# Altium PCB UF_Servo.PcbDoc (part 1 of 12)
Units mm, origin at the board's own origin, x right, y up, seen from the top; angles counter-clockwise.
Board outline 222.63 x 100.1 mm, 6 copper layers (L1, L2, L3, L4, L5, L6), stack 1.609 mm thick; 1138 components, 775 nets, 3720 pads, 1641 vias.
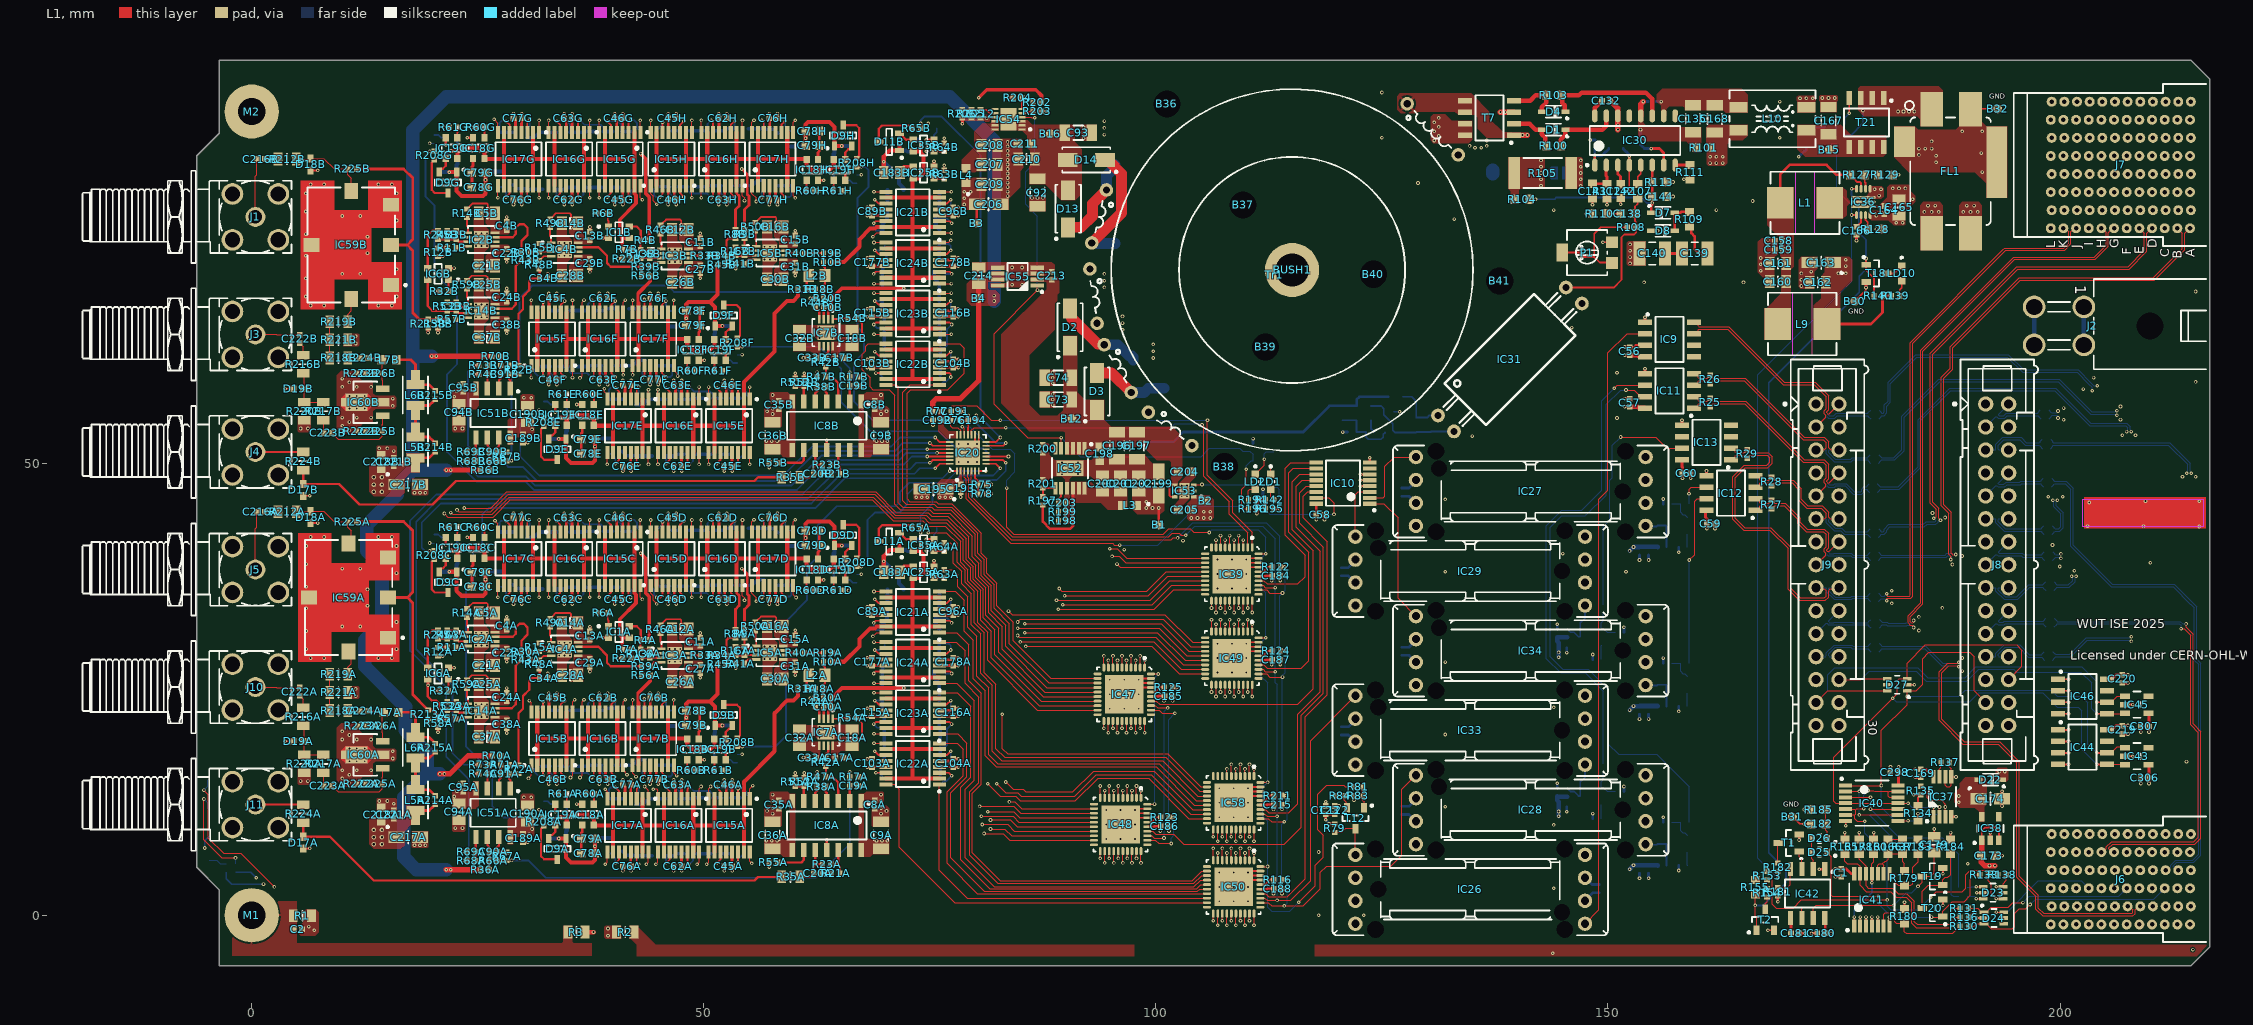
[diagram p0: L1 view]
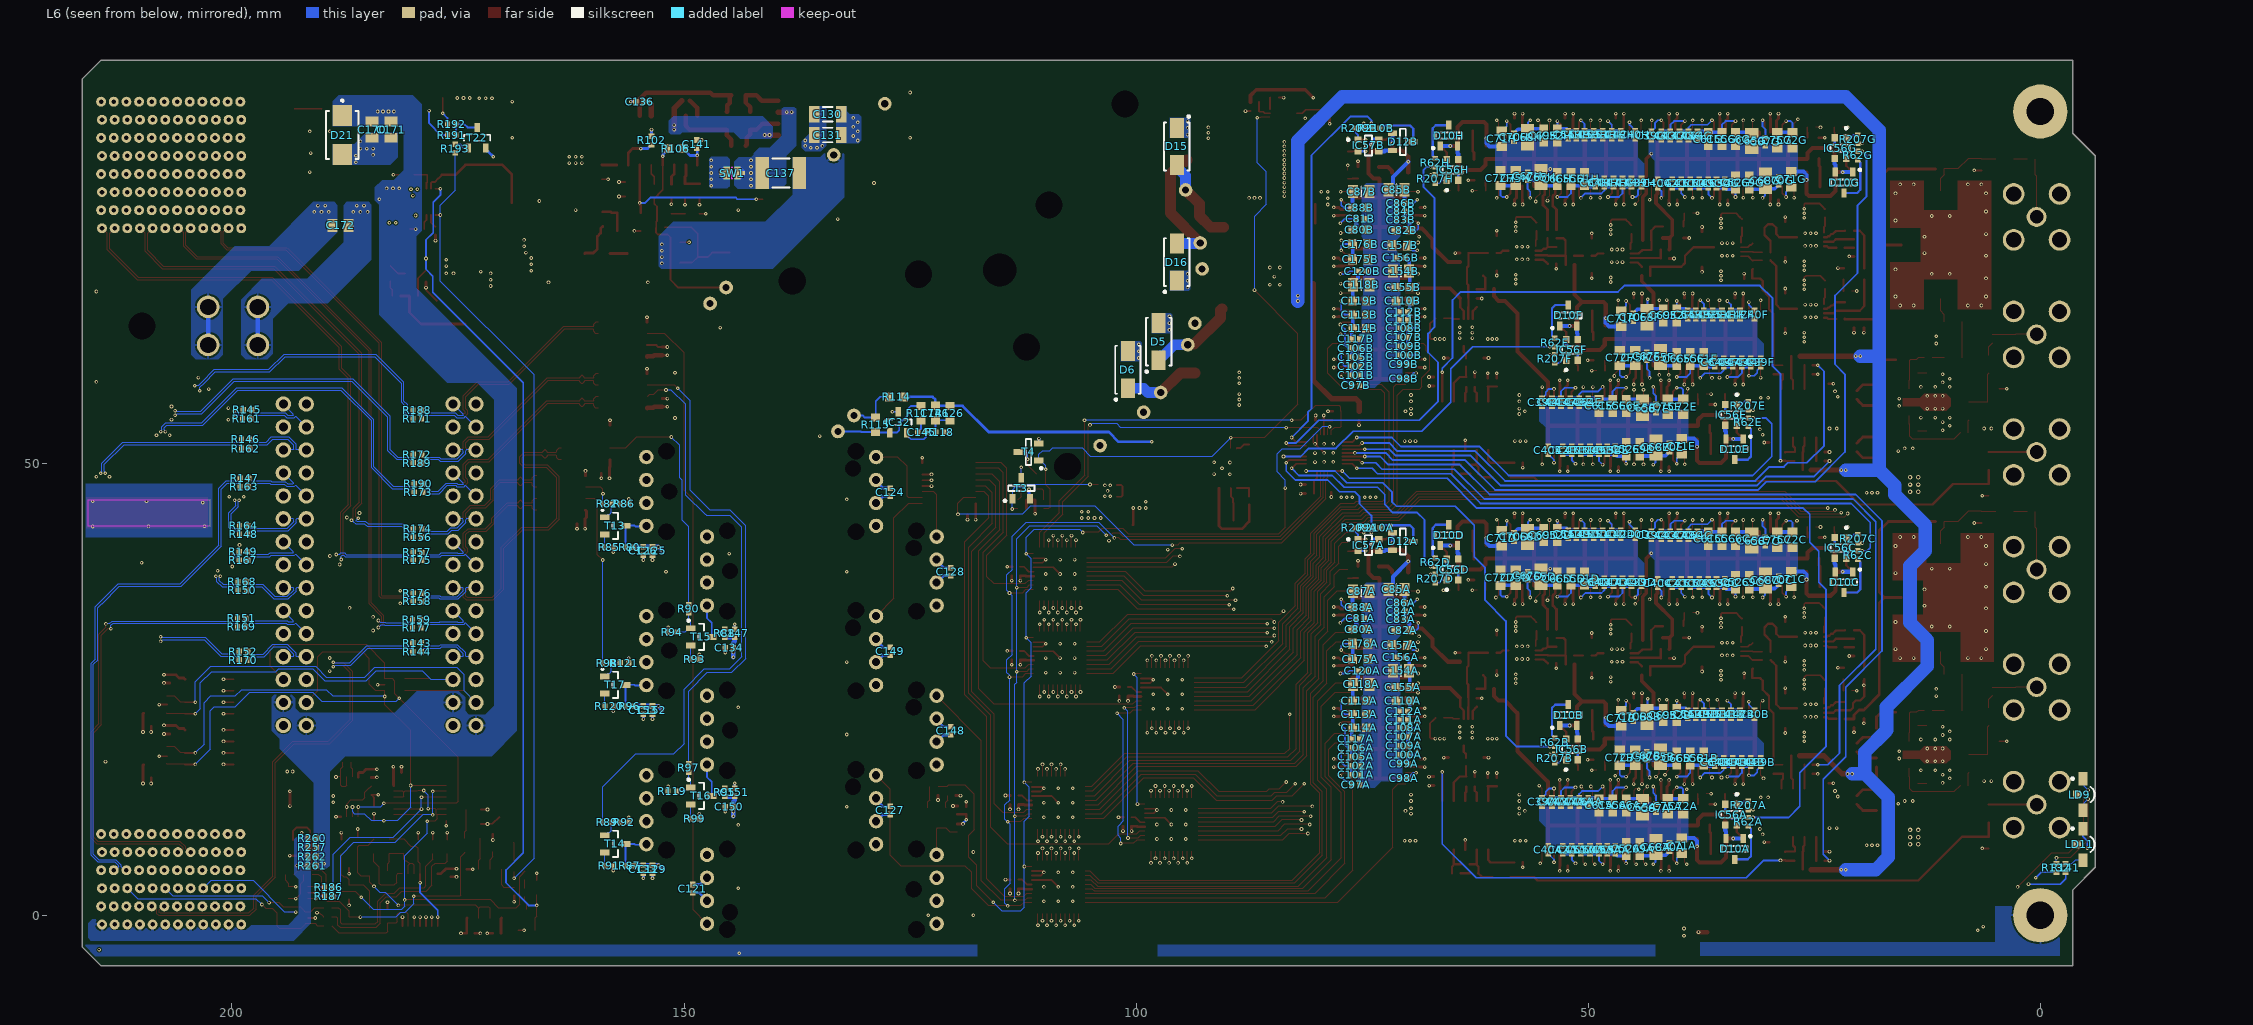
[diagram p1: L6 view, seen from below]
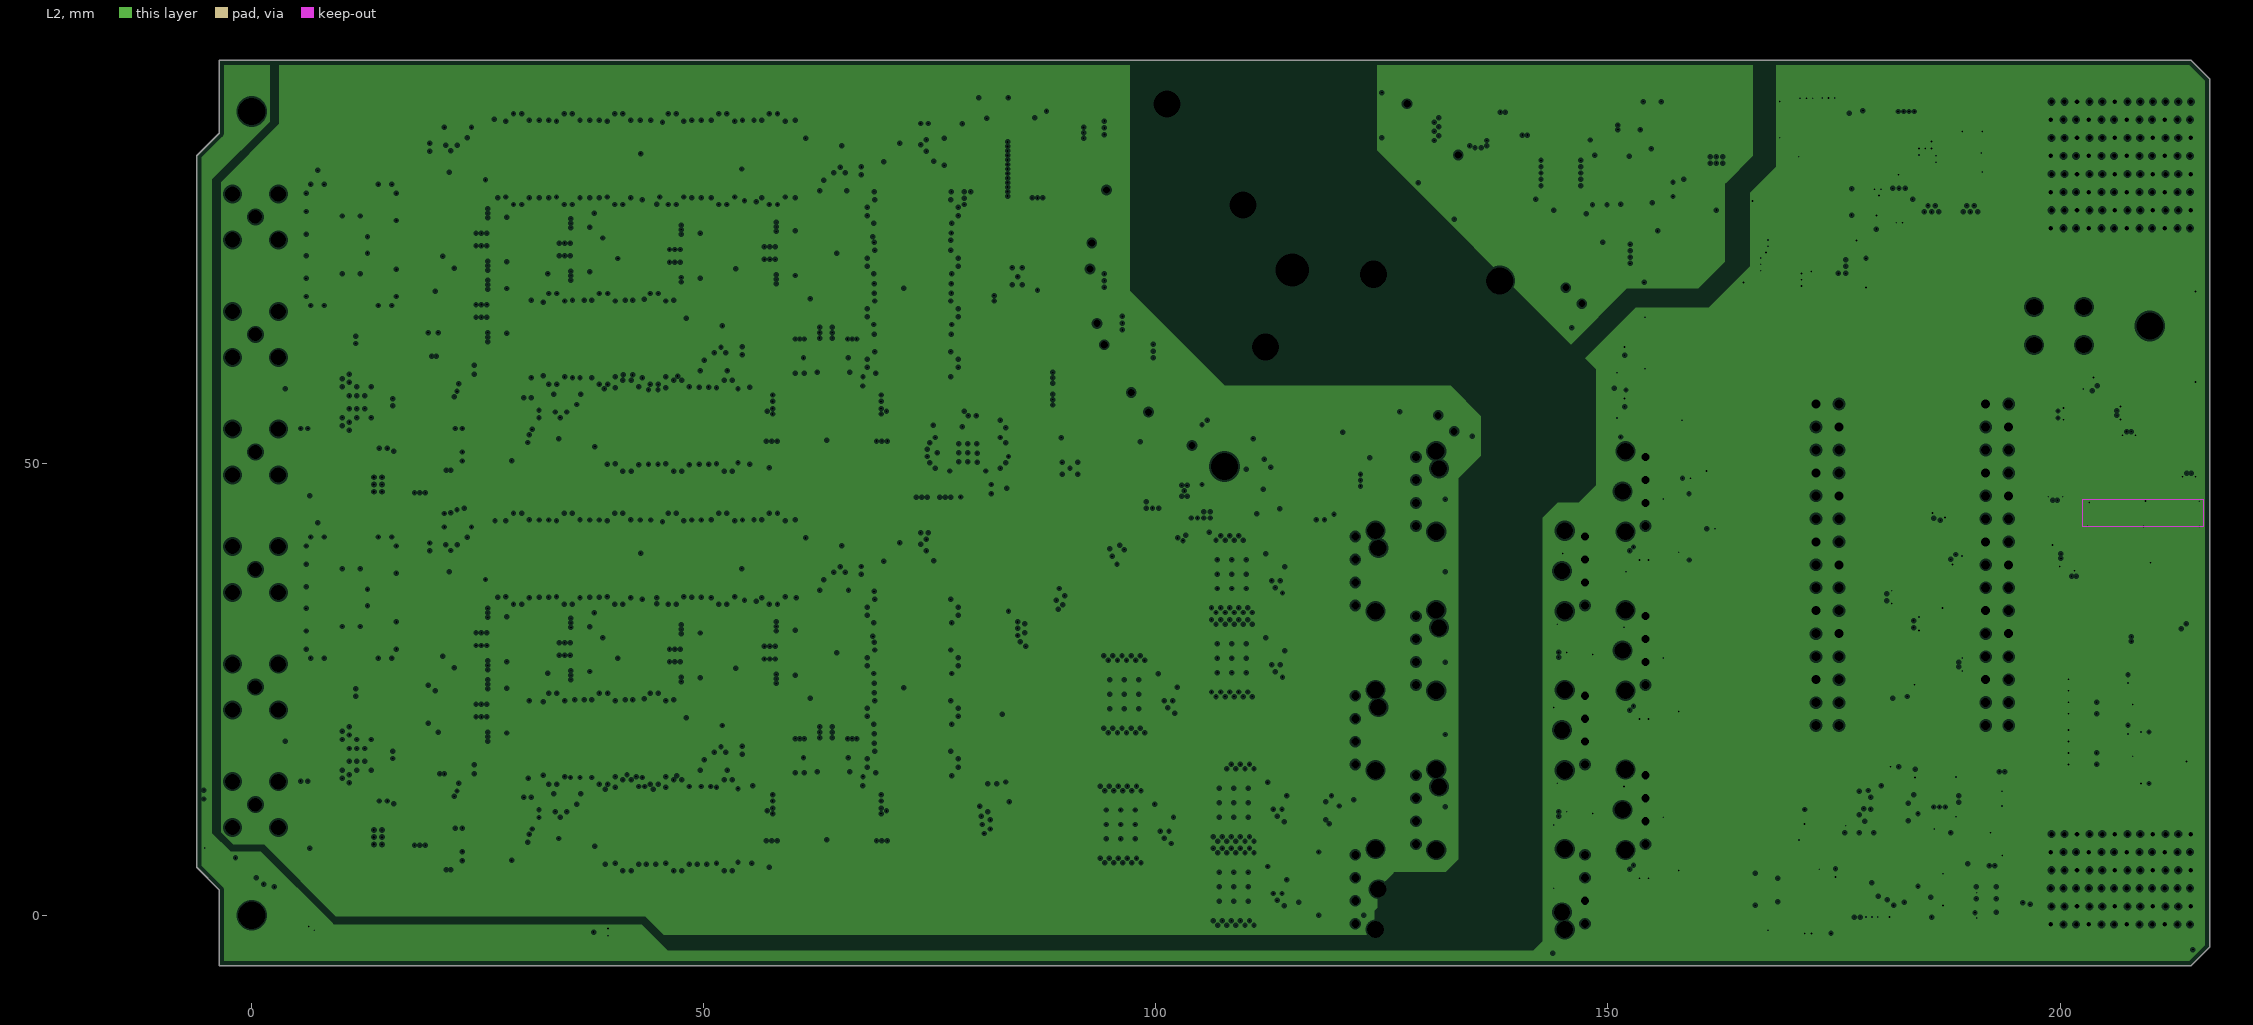
[diagram p2: L2, clearances drawn from the general rule]
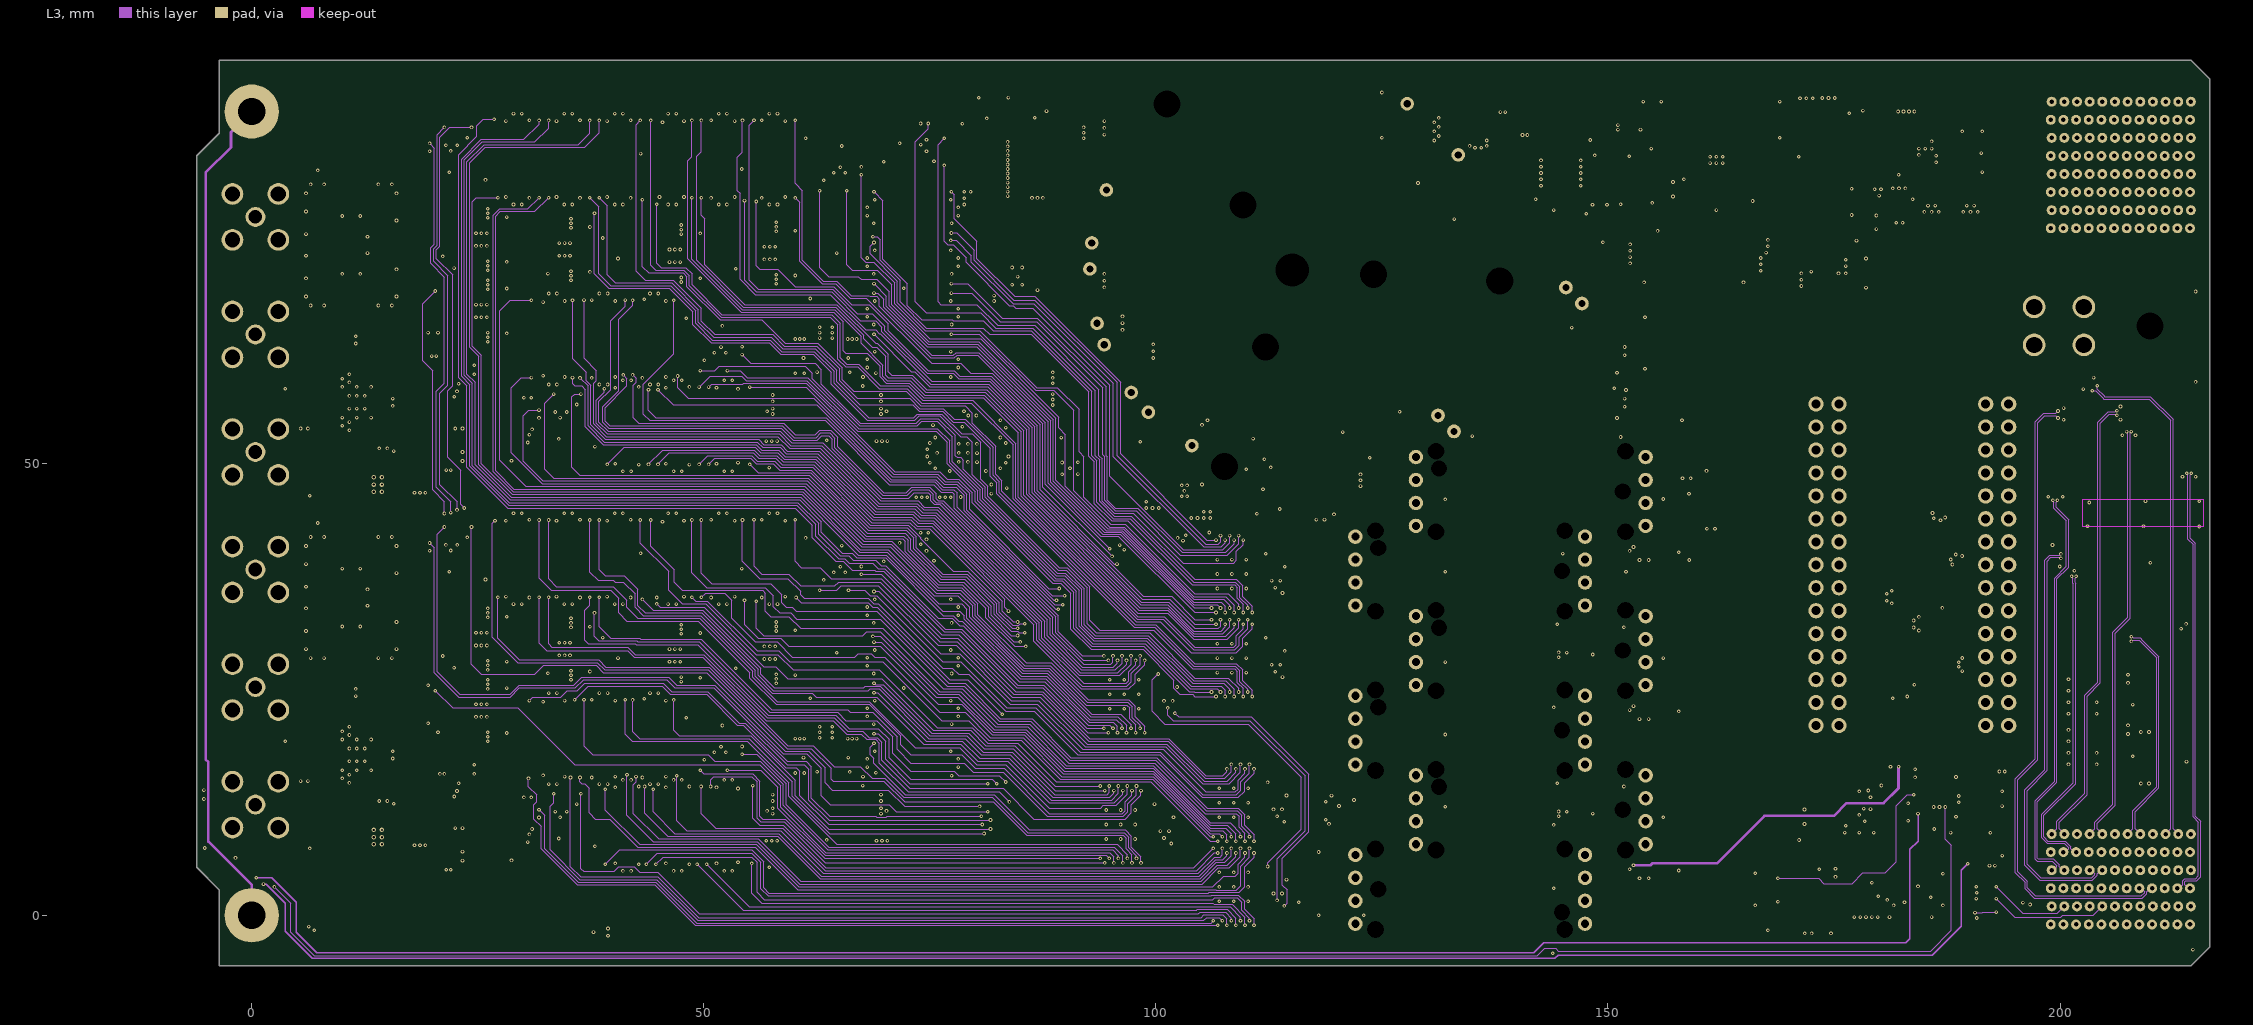
[diagram p3: L3]
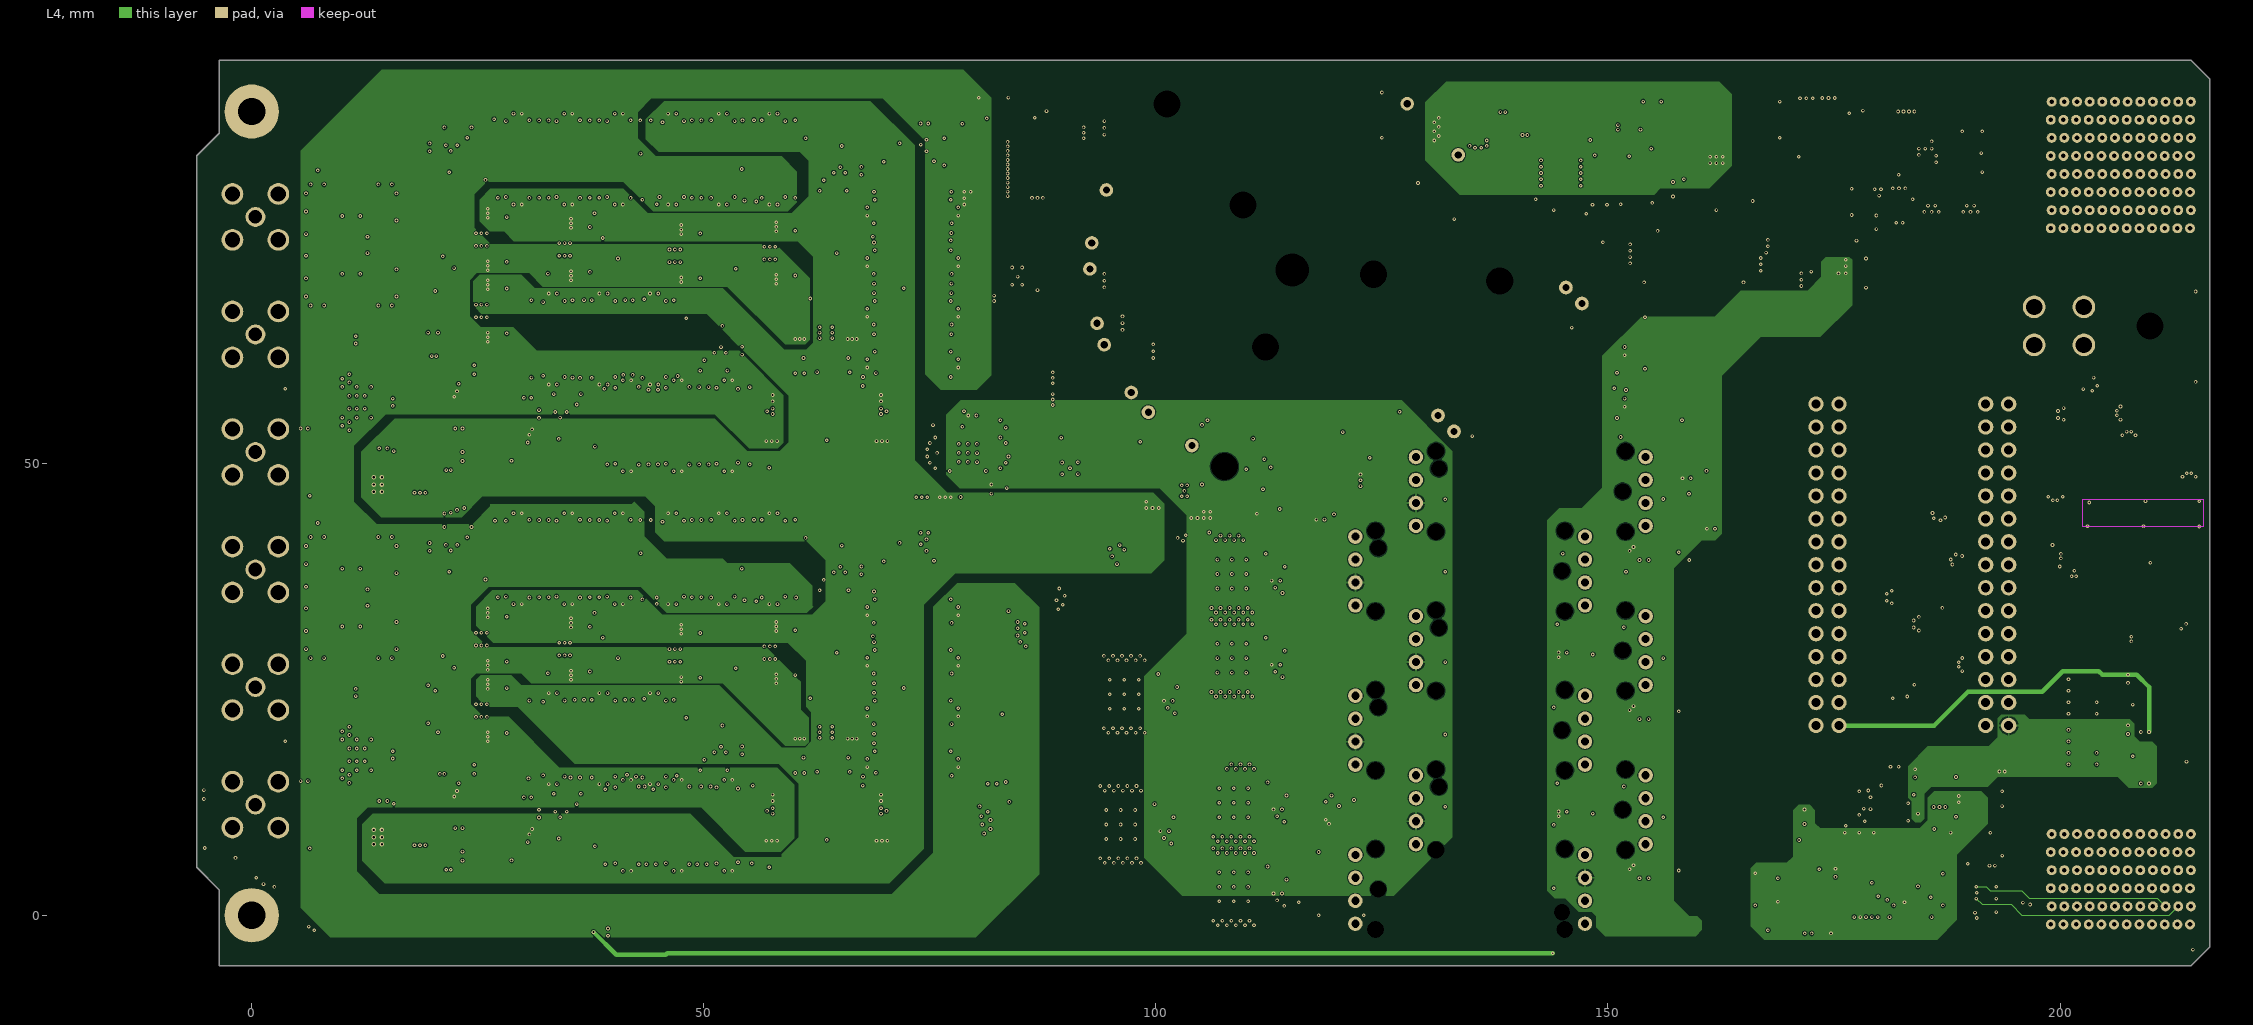
[diagram p4: L4]
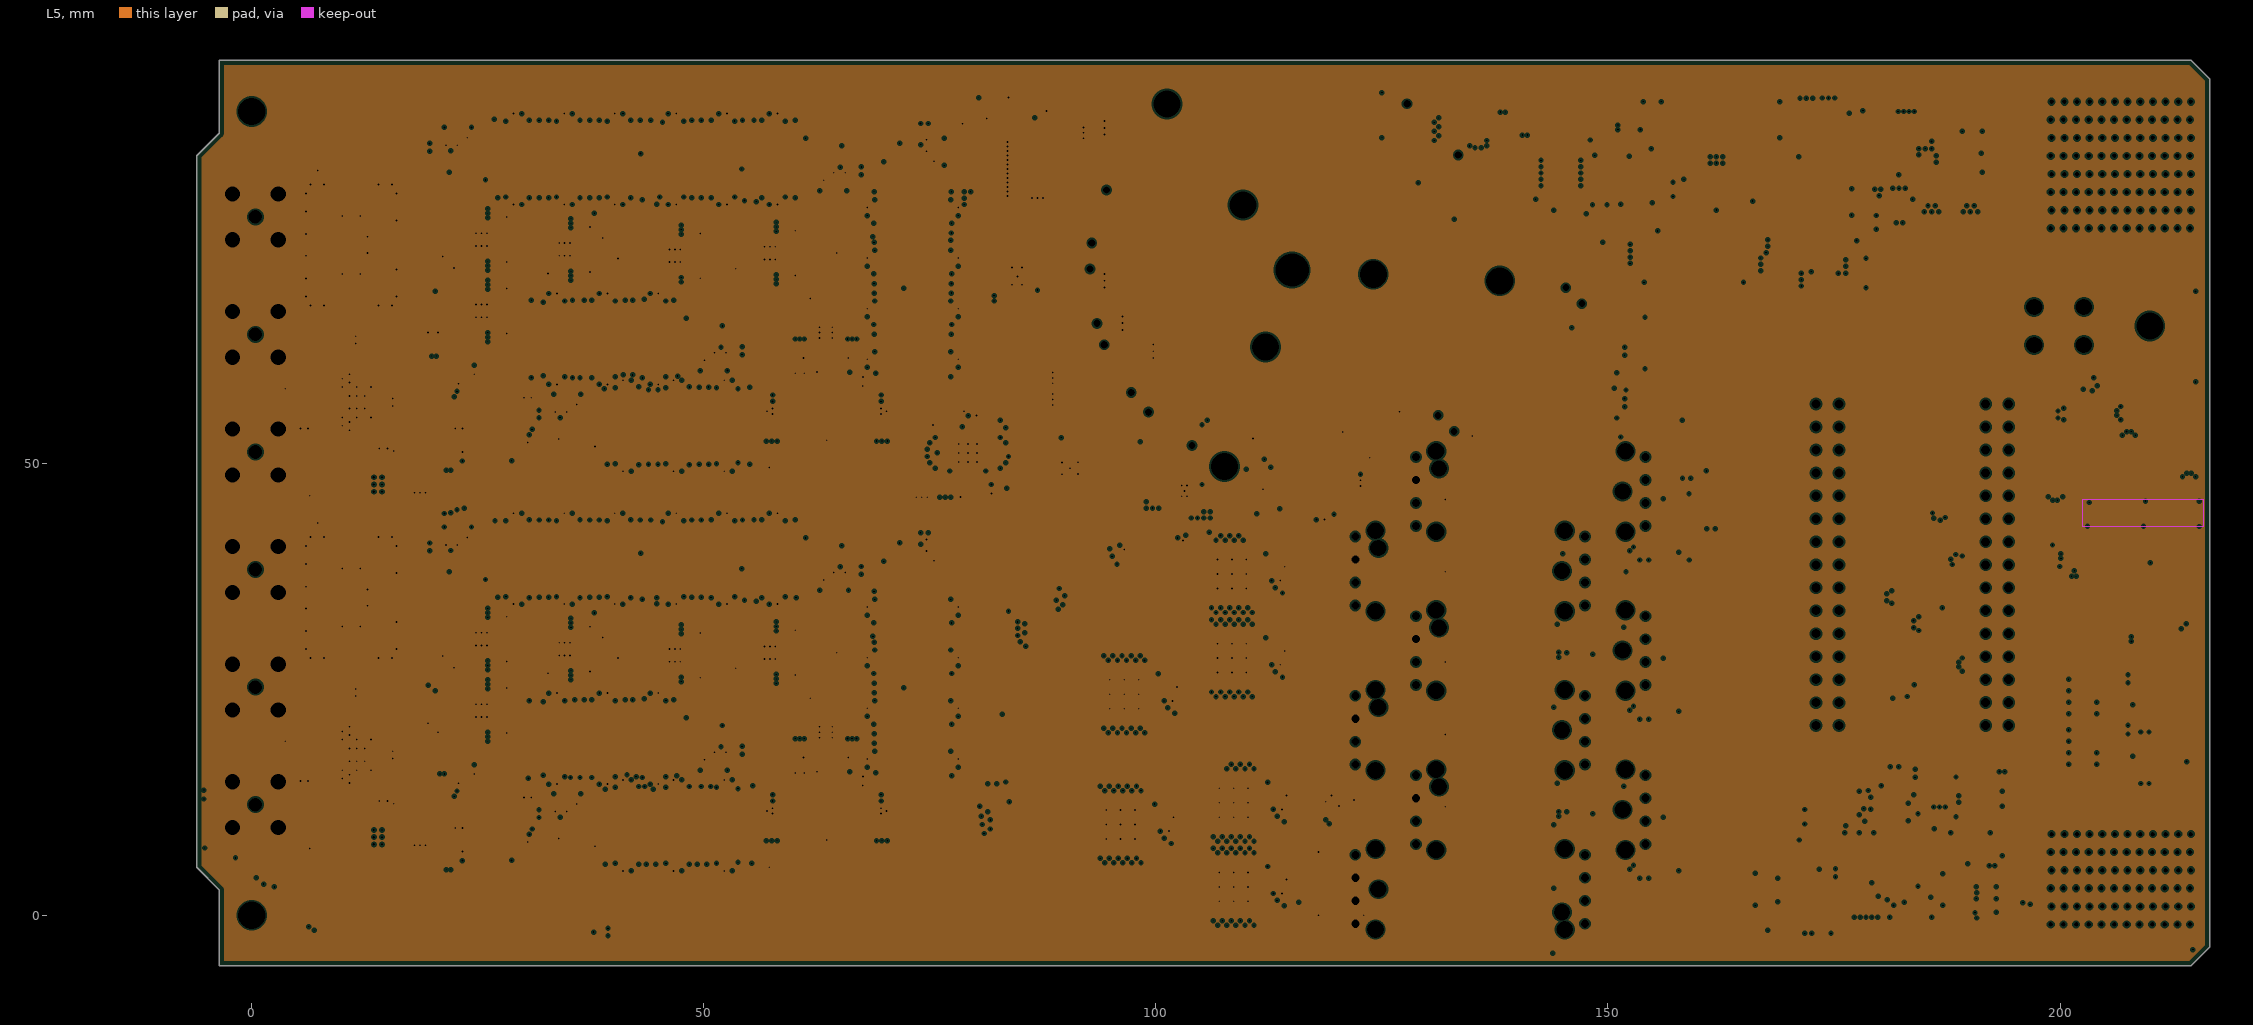
[diagram p5: L5, clearances drawn from the general rule]
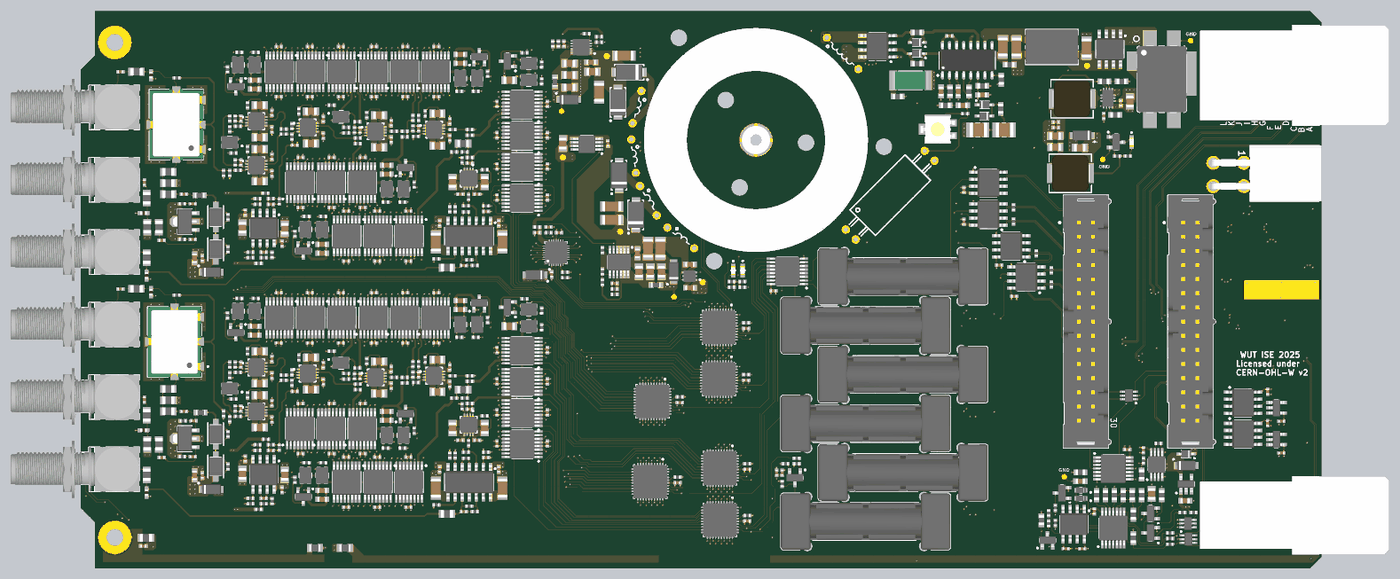
[diagram p14: 3D render of the assembled board from above, using the file's embedded part models]
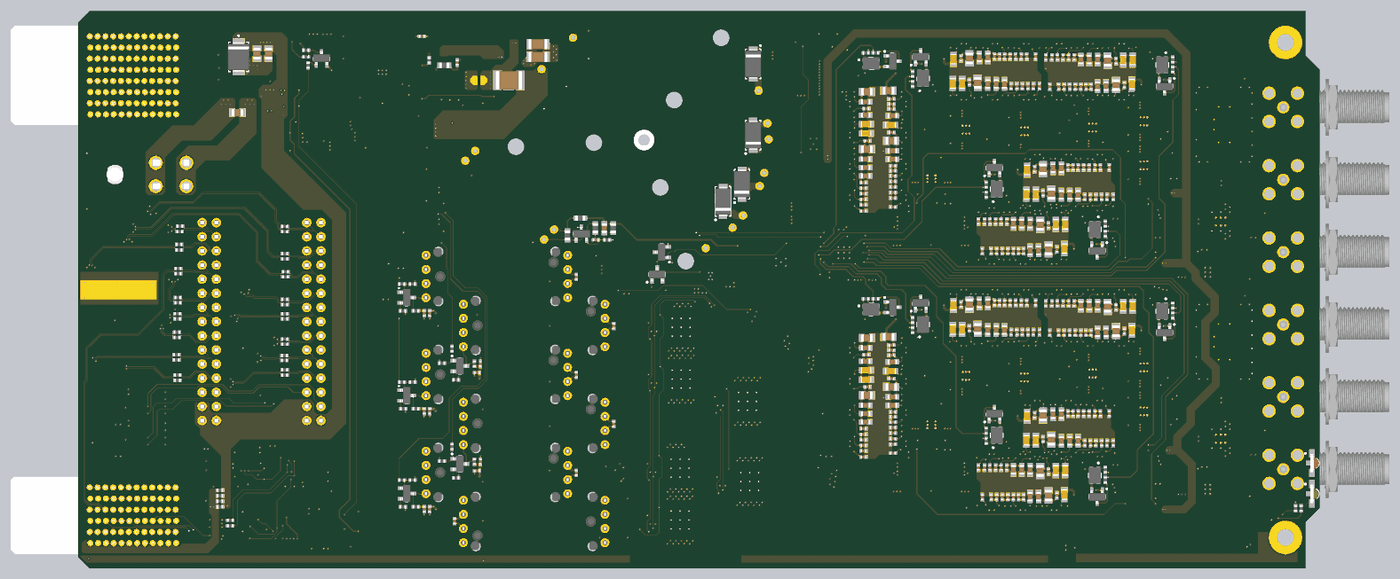
[diagram p15: 3D render of the assembled board from below, using the file's embedded part models]

## Layer stack, top to bottom
Top Solder: solder mask 0.0102, Solder Resist, Dk 3.5
L1: signal copper 0.035
Dielectric 1: prepreg 0.0764, 1080, Dk 3.91
L2: plane copper 0.0152, net (Multiple Nets)
Dielectric 2: core 0.1, Core, Dk 4.36
L3: signal copper 0.0175
Dielectric 3: prepreg 0.2104, 7628, Dk 4.4
Dielectric 4: core 0.7, FR4, Dk 4.53
Dielectric 5: prepreg 0.2104, 7628, Dk 4.4
L4: signal copper 0.0175
Dielectric 6: core 0.1, Core, Dk 4.36
L5: plane copper 0.0152, net GND
Dielectric 7: prepreg 0.0764, 1080, Dk 3.91
L6: signal copper 0.035
Bottom Solder: solder mask 0.0102, Solder Resist, Dk 3.5

## Board outline
-3.606,2.849 -6.096,5.371 -6.096,17.196 -6.096,84.061 -3.606,86.55 -3.606,94.601 214.504,94.601 216.533,92.571 216.533,-3.471 214.504,-5.5 -3.606,-5.5

## Design rules (kind name [scope] priority, off if disabled: settings)
Clearance [All] p1: gap=0.1 ignorepadtopadclearanceinfootprint=FALSE
DiffPairsRouting DiffPairsRouting_D100 [InNetClass('D100')] p1: maxlimit=0.16 minlimit=0.15 mostfreqgap=0.16 toplayer_maxgap=0.15 toplayer_prefgap=0.15 toplayer_minwidth=0.108 toplayer_maxwidth=0.108 toplayer_prefwidth=0.108 midlayer1_mingap=0.16 midlayer1_minwidth=0.102 midlayer1_maxwidth=0.102 midlayer1_prefwidth=0.102 midlayer2_mingap=0.16 midlayer2_minwidth=0.102 midlayer2_maxwidth=0.102 midlayer2_prefwidth=0.102 bottomlayer_maxgap=0.15 bottomlayer_prefgap=0.15 bottomlayer_minwidth=0.108 bottomlayer_maxwidth=0.108 bottomlayer_prefwidth=0.108 impedanceprofiledriven=TRUE impedanceprofileid={D2DCF238-4DA4-4039-ADAF-720FADDC23DE} impedanceprofilevalue=100.000000 maxuncoupledlength=12.7
PlaneClearance [All] p1: clearance=0.2
PlaneConnect [All] p1: pad.planeconnectstyle=Relief pad.reliefexpansion=0.508 pad.reliefentries=4 pad.reliefconductorwidth=0.254 pad.reliefairgap=0.2 via.planeconnectstyle=Direct via.reliefexpansion=0.508 via.reliefentries=4 via.reliefconductorwidth=0.254 via.reliefairgap=0.254
PolygonConnect [All] p1: thpad.connectstyle=Relief thpad.reliefconductorwidth=0.254 thpad.reliefentries=4 thpad.polygonreliefangle="90 Angle" thpad.airgapwidth=0.2 smdpad.connectstyle=Direct smdpad.reliefconductorwidth=0.254 smdpad.reliefentries=4 smdpad.polygonreliefangle="90 Angle" smdpad.airgapwidth=0.254 via.connectstyle=Direct via.reliefconductorwidth=0.254 via.reliefentries=4 via.polygonreliefangle="90 Angle" via.airgapwidth=0.254
RoutingVias [All] p1: holewidth=0.2 width=0.4 viastyle="Through Hole" minholewidth=0.2 minwidth=0.4 maxholewidth=0.711 maxwidth=1.27
SolderMaskExpansion [All] p1: expansion=0.05 istentingtop=FALSE
SupplyNets "Schematic Supply Nets_18" [InNet('P2V5_REF')] p1: voltage=0.000
SupplyNets "Schematic Supply Nets_16" [InNet('GND_DIOT')] p2: voltage=0.000
SupplyNets "Schematic Supply Nets_15" [InNet('P6V0')] p3: voltage=0.000
SupplyNets "Schematic Supply Nets_14" [InNet('P12V0_EEM')] p4: voltage=0.000
SupplyNets "Schematic Supply Nets_13" [InNet('P3V3_MP')] p5: voltage=0.000
SupplyNets "Schematic Supply Nets_12" [InNet('STRIP1')] p6: voltage=0.000
SupplyNets "Schematic Supply Nets_11" [InNet('GND_LLC')] p7: voltage=0.000
SupplyNets "Schematic Supply Nets_10" [InNet('P3V3_MP2')] p8: voltage=0.000
SupplyNets "Schematic Supply Nets_9" [InNet('N6V0')] p9: voltage=0.000
SupplyNets "Schematic Supply Nets_8" [InNet('P3V3_ISO')] p10: voltage=0.000
SupplyNets "Schematic Supply Nets_7" [InNet('P3V3_DIOT')] p11: voltage=0.000
SupplyNets "Schematic Supply Nets_6" [InNet('P12V0_LLC')] p12: voltage=0.000
SupplyNets "Schematic Supply Nets_4" [InNet('P12V0_DIOT')] p13: voltage=0.000
SupplyNets "Schematic Supply Nets_3" [InNet('P3V3')] p14: voltage=0.000
SupplyNets "Schematic Supply Nets_2" [InNet('P5V0')] p15: voltage=0.000
SupplyNets "Schematic Supply Nets_1" [InNet('N5V0')] p16: voltage=0.000
SupplyNets "Schematic Supply Nets" [InNet('GND')] p17: voltage=0.000
Width Width_S50 [InNetClass('S50')] p1: maxlimit=10 minlimit=0.1 preferedwidth=0.132 toplayer_minwidth=0.132 toplayer_maxwidth=0.132 bottomlayer_minwidth=0.132 bottomlayer_maxwidth=0.132 impedanceprofiledriven=TRUE impedanceprofileid={ACBF6A8C-5145-4914-8C15-B171286C9024} impedanceprofilevalue=50.000000 minimp=50.000000 maximp=50.000000 favimp=50.000000
Width [All] p2: maxlimit=10 minlimit=0.1 preferedwidth=0.1
27 further rules are at their usual default settings.

## Classes and differential pairs
net class CH_B_ctrl: CAP0.CAP_SEL0.SEL0 CAP0.CAP_SEL0.SEL1 CAP0.CAP_SEL0.SEL2 CAP0.CAP_SEL0.SEL3 CAP0.CAP_SEL1.SEL0 CAP0.CAP_SEL1.SEL1 CAP0.CAP_SEL1.SEL2 CAP0.CAP_SEL1.SEL3 CAP0.CAP_SEL2.SEL0 CAP0.CAP_SEL2.SEL1 CAP0.CAP_SEL2.SEL2 CAP0.CAP_SEL2.SEL3 CAP1.CAP_SEL0.SEL0 CAP1.CAP_SEL0.SEL1 CAP1.CAP_SEL0.SEL2 CAP1.CAP_SEL0.SEL3 CAP1.CAP_SEL1.SEL0 CAP1.CAP_SEL1.SEL1 CAP1.CAP_SEL1.SEL2 CAP1.CAP_SEL1.SEL3 CAP1.CAP_SEL2.SEL0 CAP1.CAP_SEL2.SEL1 CAP1.CAP_SEL2.SEL2 CAP1.CAP_SEL2.SEL3 CAP2.CAP_SEL0.SEL0 CAP2.CAP_SEL0.SEL1 CAP2.CAP_SEL0.SEL2 CAP2.CAP_SEL0.SEL3 CAP2.CAP_SEL1.SEL0 CAP2.CAP_SEL1.SEL1 CAP2.CAP_SEL1.SEL2 CAP2.CAP_SEL1.SEL3 CAP2.CAP_SEL2.SEL0 CAP2.CAP_SEL2.SEL1 CAP2.CAP_SEL2.SEL2 CAP2.CAP_SEL2.SEL3 CAP2.CAP_SEL3.SEL0 CAP2.CAP_SEL3.SEL1 CAP2.CAP_SEL3.SEL2 CAP2.CAP_SEL3.SEL3 CAP3.CAP_SEL0.SEL0 CAP3.CAP_SEL0.SEL1 CAP3.CAP_SEL0.SEL2 CAP3.CAP_SEL0.SEL3 CAP3.CAP_SEL1.SEL0 CAP3.CAP_SEL1.SEL1 CAP3.CAP_SEL1.SEL2 CAP3.CAP_SEL1.SEL3 CAP3.CAP_SEL2.SEL0 CAP3.CAP_SEL2.SEL1 CAP3.CAP_SEL2.SEL2 CAP3.CAP_SEL2.SEL3 CAP4.CAP_SEL0.SEL0 CAP4.CAP_SEL0.SEL1 CAP4.CAP_SEL0.SEL2 CAP4.CAP_SEL0.SEL3 CAP4.CAP_SEL1.SEL0 CAP4.CAP_SEL1.SEL1 CAP4.CAP_SEL1.SEL2 CAP4.CAP_SEL1.SEL3 CAP4.CAP_SEL2.SEL0 CAP4.CAP_SEL2.SEL1 CAP4.CAP_SEL2.SEL2 CAP4.CAP_SEL2.SEL3 DAC_LDACn DAC_RESETn EXP0_P16 EXP0_P17 EXP0_P18 EXP0_P31 EXP1_P4 EXP1_P5 EXP1_P21 EXP1_P22 EXP1_P23 EXP2_P9 EXP2_P10 EXP2_P11 EXP2_P24 EXP2_P25 EXP2_P26 EXP2_P27 EXP2_P28 NetIC39_3 NetIC39_4 NetIC39_6 NetIC39_10 NetIC39_12 NetIC39_13 NetIC39_14 NetIC47_25 NetIC47_26 NetIC47_27 NetIC49_1 NetIC49_3 NetIC49_24 NetIC49_26
net class CH_A_ctrl: CAP5.CAP_SEL0.SEL0 CAP5.CAP_SEL0.SEL1 CAP5.CAP_SEL0.SEL2 CAP5.CAP_SEL0.SEL3 CAP5.CAP_SEL1.SEL0 CAP5.CAP_SEL1.SEL1 CAP5.CAP_SEL1.SEL2 CAP5.CAP_SEL1.SEL3 CAP5.CAP_SEL2.SEL0 CAP5.CAP_SEL2.SEL1 CAP5.CAP_SEL2.SEL2 CAP5.CAP_SEL2.SEL3 CAP6.CAP_SEL0.SEL0 CAP6.CAP_SEL0.SEL1 CAP6.CAP_SEL0.SEL2 CAP6.CAP_SEL0.SEL3 CAP6.CAP_SEL1.SEL0 CAP6.CAP_SEL1.SEL1 CAP6.CAP_SEL1.SEL2 CAP6.CAP_SEL1.SEL3 CAP6.CAP_SEL2.SEL0 CAP6.CAP_SEL2.SEL1 CAP6.CAP_SEL2.SEL2 CAP6.CAP_SEL2.SEL3 CAP7.CAP_SEL0.SEL0 CAP7.CAP_SEL0.SEL1 CAP7.CAP_SEL0.SEL2 CAP7.CAP_SEL0.SEL3 CAP7.CAP_SEL1.SEL0 CAP7.CAP_SEL1.SEL1 CAP7.CAP_SEL1.SEL2 CAP7.CAP_SEL1.SEL3 CAP7.CAP_SEL2.SEL0 CAP7.CAP_SEL2.SEL1 CAP7.CAP_SEL2.SEL2 CAP7.CAP_SEL2.SEL3 CAP7.CAP_SEL3.SEL0 CAP7.CAP_SEL3.SEL1 CAP7.CAP_SEL3.SEL2 CAP7.CAP_SEL3.SEL3 CAP8.CAP_SEL0.SEL0 CAP8.CAP_SEL0.SEL1 CAP8.CAP_SEL0.SEL2 CAP8.CAP_SEL0.SEL3 CAP8.CAP_SEL1.SEL0 CAP8.CAP_SEL1.SEL1 CAP8.CAP_SEL1.SEL2 CAP8.CAP_SEL1.SEL3 CAP8.CAP_SEL2.SEL0 CAP8.CAP_SEL2.SEL1 CAP8.CAP_SEL2.SEL2 CAP8.CAP_SEL2.SEL3 CAP9.CAP_SEL0.SEL0 CAP9.CAP_SEL0.SEL1 CAP9.CAP_SEL0.SEL2 CAP9.CAP_SEL0.SEL3 CAP9.CAP_SEL1.SEL0 CAP9.CAP_SEL1.SEL1 CAP9.CAP_SEL1.SEL2 CAP9.CAP_SEL1.SEL3 CAP9.CAP_SEL2.SEL0 CAP9.CAP_SEL2.SEL1 CAP9.CAP_SEL2.SEL2 CAP9.CAP_SEL2.SEL3 EXP2_P29 EXP2_P30 EXP3_P16 EXP3_P17 EXP3_P18 EXP3_P31 EXP4_P4 EXP4_P5 EXP4_P22 EXP4_P23 EXP4_P24 EXP5_24 EXP5_25 EXP5_26 EXP5_P9 EXP5_P10 EXP5_P11 NetIC58_8 NetIC58_9 NetIC58_10
net class DAC: DAC_VOUT0 DAC_VOUT1 DAC_VOUT2 DAC_VOUT3 DAC_VOUT4 DAC_VOUT5 DAC_VOUT6 DAC_VOUT7 DAC_VOUT8 DAC_VOUT9 DAC_VOUT10 DAC_VOUT11 DAC_VOUT12 DAC_VOUT13 DAC_VOUT14 DAC_VOUT15
channel class Phase_Detector: U_Phase_DetectorA U_Phase_DetectorB
net class S50: LO_IN_A LO_IN_B NetC216A_2 NetC216B_2 NetC222A_1 NetC222B_1 NetC223A_1 NetC223A_2 NetC223B_1 NetC223B_2 NetC224A_1 NetC224A_2 NetC224B_1 NetC224B_2 NetD18A_2 NetD18B_2 NetD19A_2 NetD19B_2 NetIC59A_2 NetIC59B_2 NetR218A_2 NetR218B_2 RF_IN_A RF_IN_B
component class U_Phase_DetectorB: C216B C217B C218B C221B C222B C223B C224B C225B C226B D18B D19B IC59B IC60B L5B L6B L7B R212B R213B R214B R215B R216B R217B R218B R219B R220B R221B R222B R223B R225B
component class U_Phase_DetectorA: C216A C217A C218A C221A C222A C223A C224A C225A C226A D18A D19A IC59A IC60A L5A L6A L7A R212A R213A R214A R215A R216A R217A R218A R219A R220A R221A R222A R223A R225A
differential pair class MGT: BP_MGT_Rx BP_MGT_Tx
net class IO_Expander: CAP0.CAP_SEL0.SEL0 CAP0.CAP_SEL0.SEL1 CAP0.CAP_SEL0.SEL2 CAP0.CAP_SEL0.SEL3 CAP0.CAP_SEL1.SEL0 CAP0.CAP_SEL1.SEL1 CAP0.CAP_SEL1.SEL2 CAP0.CAP_SEL1.SEL3 CAP0.CAP_SEL2.SEL0 CAP0.CAP_SEL2.SEL1 CAP0.CAP_SEL2.SEL2 CAP0.CAP_SEL2.SEL3 CAP1.CAP_SEL0.SEL0 CAP1.CAP_SEL0.SEL1 CAP1.CAP_SEL0.SEL2 CAP1.CAP_SEL0.SEL3 CAP1.CAP_SEL1.SEL0 CAP1.CAP_SEL1.SEL1 CAP1.CAP_SEL1.SEL2 CAP1.CAP_SEL1.SEL3 CAP1.CAP_SEL2.SEL0 CAP1.CAP_SEL2.SEL1 CAP1.CAP_SEL2.SEL2 CAP1.CAP_SEL2.SEL3 CAP2.CAP_SEL0.SEL0 CAP2.CAP_SEL0.SEL1 CAP2.CAP_SEL0.SEL2 CAP2.CAP_SEL0.SEL3 CAP2.CAP_SEL1.SEL0 CAP2.CAP_SEL1.SEL1 CAP2.CAP_SEL1.SEL2 CAP2.CAP_SEL1.SEL3 CAP2.CAP_SEL2.SEL0 CAP2.CAP_SEL2.SEL1 CAP2.CAP_SEL2.SEL2 CAP2.CAP_SEL2.SEL3 CAP2.CAP_SEL3.SEL0 CAP2.CAP_SEL3.SEL1 CAP2.CAP_SEL3.SEL2 CAP2.CAP_SEL3.SEL3 CAP3.CAP_SEL0.SEL0 CAP3.CAP_SEL0.SEL1 CAP3.CAP_SEL0.SEL2 CAP3.CAP_SEL0.SEL3 CAP3.CAP_SEL1.SEL0 CAP3.CAP_SEL1.SEL1 CAP3.CAP_SEL1.SEL2 CAP3.CAP_SEL1.SEL3 CAP3.CAP_SEL2.SEL0 CAP3.CAP_SEL2.SEL1 CAP3.CAP_SEL2.SEL2 CAP3.CAP_SEL2.SEL3 CAP4.CAP_SEL0.SEL0 CAP4.CAP_SEL0.SEL1 CAP4.CAP_SEL0.SEL2 CAP4.CAP_SEL0.SEL3 CAP4.CAP_SEL1.SEL0 CAP4.CAP_SEL1.SEL1 CAP4.CAP_SEL1.SEL2 CAP4.CAP_SEL1.SEL3 CAP4.CAP_SEL2.SEL0 CAP4.CAP_SEL2.SEL1 CAP4.CAP_SEL2.SEL2 CAP4.CAP_SEL2.SEL3 CAP5.CAP_SEL0.SEL0 CAP5.CAP_SEL0.SEL1 CAP5.CAP_SEL0.SEL2 CAP5.CAP_SEL0.SEL3 CAP5.CAP_SEL1.SEL0 CAP5.CAP_SEL1.SEL1 CAP5.CAP_SEL1.SEL2 CAP5.CAP_SEL1.SEL3 CAP5.CAP_SEL2.SEL0 CAP5.CAP_SEL2.SEL1 CAP5.CAP_SEL2.SEL2 CAP5.CAP_SEL2.SEL3 CAP6.CAP_SEL0.SEL0 CAP6.CAP_SEL0.SEL1 CAP6.CAP_SEL0.SEL2 CAP6.CAP_SEL0.SEL3 CAP6.CAP_SEL1.SEL0 CAP6.CAP_SEL1.SEL1 CAP6.CAP_SEL1.SEL2 CAP6.CAP_SEL1.SEL3 CAP6.CAP_SEL2.SEL0 CAP6.CAP_SEL2.SEL1 CAP6.CAP_SEL2.SEL2 CAP6.CAP_SEL2.SEL3 CAP7.CAP_SEL0.SEL0 CAP7.CAP_SEL0.SEL1 CAP7.CAP_SEL0.SEL2 CAP7.CAP_SEL0.SEL3 CAP7.CAP_SEL1.SEL0 CAP7.CAP_SEL1.SEL1 CAP7.CAP_SEL1.SEL2 CAP7.CAP_SEL1.SEL3 CAP7.CAP_SEL2.SEL0 CAP7.CAP_SEL2.SEL1 CAP7.CAP_SEL2.SEL2 CAP7.CAP_SEL2.SEL3 CAP7.CAP_SEL3.SEL0 CAP7.CAP_SEL3.SEL1 CAP7.CAP_SEL3.SEL2 CAP7.CAP_SEL3.SEL3 CAP8.CAP_SEL0.SEL0 CAP8.CAP_SEL0.SEL1 CAP8.CAP_SEL0.SEL2 CAP8.CAP_SEL0.SEL3 CAP8.CAP_SEL1.SEL0 CAP8.CAP_SEL1.SEL1 CAP8.CAP_SEL1.SEL2 CAP8.CAP_SEL1.SEL3 CAP8.CAP_SEL2.SEL0 CAP8.CAP_SEL2.SEL1 CAP8.CAP_SEL2.SEL2 CAP8.CAP_SEL2.SEL3 CAP9.CAP_SEL0.SEL0 CAP9.CAP_SEL0.SEL1 CAP9.CAP_SEL0.SEL2 CAP9.CAP_SEL0.SEL3 CAP9.CAP_SEL1.SEL0 CAP9.CAP_SEL1.SEL1 CAP9.CAP_SEL1.SEL2 CAP9.CAP_SEL1.SEL3 CAP9.CAP_SEL2.SEL0 CAP9.CAP_SEL2.SEL1 CAP9.CAP_SEL2.SEL2 CAP9.CAP_SEL2.SEL3 DAC_LDACn DAC_RESETn EXP0_P16 EXP0_P17 EXP0_P18 EXP0_P31 EXP1_P4 EXP1_P5 EXP1_P21 EXP1_P22 EXP1_P23 EXP2_P9 EXP2_P10 EXP2_P11 EXP2_P24 EXP2_P25 EXP2_P26 EXP2_P27 EXP2_P28 EXP2_P29 EXP2_P30 EXP3_P16 EXP3_P17 EXP3_P18 EXP3_P31 EXP4_P4 EXP4_P5 EXP4_P22 EXP4_P23 EXP4_P24 EXP5_24 EXP5_25 EXP5_26 EXP5_P9 EXP5_P10 EXP5_P11 NetIC50_21 NetIC50_22 NetIC50_23 NetIC50_25 NetIC50_27 NetIC50_29
channel class PID: U_PIDA U_PIDB
channel class Cap_Array_100p_16u: U_PIDA_U_Cap_Array_100p_16uA U_PIDB_U_Cap_Array_100p_16uB
component class U_PIDA: C3A C4A C5A C6A C7A C8A C9A C10A C11A C12A C13A C14A C15A C16A C17A C18A C19A C20A C21A C22A C23A C24A C25A C26A C27A C28A C29A C30A C31A C32A C33A C34A C35A C36A C37A C38A C90A C91A C94A C95A C189A C190A D17A IC1A IC2A IC3A IC4A IC5A IC6A IC7A IC8A IC14A IC51A L2A R4A R5A R6A R7A R8A R9A R10A R11A R12A R13A R14A R15A R16A R17A R18A R19A R20A R21A R22A R23A R24A R30A R31A R32A R33A R34A R35A R36A R38A R39A R40A R41A R42A R43A R44A R45A R46A R47A R48A R49A R50A R51A R52A R53A R54A R55A R56A R57A R58A R59A R66A R67A R68A R69A R70A R71A R72A R73A R74A R224A
component class U_DAC: C191 C192 C193 C194 C195 IC20 R75 R76 R77 R78
component class U_PIDB_U_Cap_Array_100p_400nH: C39H C40H C41H C42H C43H C44H C45H C46H C47H C48H C49H C50H C51H C52H C53H C54H C55H C61H C62H C63H C64H C65H C66H C67H C68H C69H C70H C71H C72H C75H C76H C77H C78H C79H D9H D10H IC15H IC16H IC17H IC18H IC19H IC56H R60H R61H R62H R207H R208H
component class U_PIDB_U_Cap_Array_100p_400nG: C39G C40G C41G C42G C43G C44G C45G C46G C47G C48G C49G C50G C51G C52G C53G C54G C55G C61G C62G C63G C64G C65G C66G C67G C68G C69G C70G C71G C72G C75G C76G C77G C78G C79G D9G D10G IC15G IC16G IC17G IC18G IC19G IC56G R60G R61G R62G R207G R208G
component class U_PIDB_U_Cap_Array_100p_400nF: C39F C40F C41F C42F C43F C44F C45F C46F C47F C48F C49F C50F C51F C52F C53F C54F C55F C61F C62F C63F C64F C65F C66F C67F C68F C69F C70F C71F C72F C75F C76F C77F C78F C79F D9F D10F IC15F IC16F IC17F IC18F IC19F IC56F R60F R61F R62F R207F R208F
component class U_PIDB_U_Cap_Array_100p_400nE: C39E C40E C41E C42E C43E C44E C45E C46E C47E C48E C49E C50E C51E C52E C53E C54E C55E C61E C62E C63E C64E C65E C66E C67E C68E C69E C70E C71E C72E C75E C76E C77E C78E C79E D9E D10E IC15E IC16E IC17E IC18E IC19E IC56E R60E R61E R62E R207E R208E
component class U_PIDB_U_Cap_Array_100p_16uB: C80B C81B C82B C83B C84B C85B C86B C87B C88B C89B C96B C97B C98B C99B C100B C101B C102B C103B C104B C105B C106B C107B C108B C109B C110B C111B C112B C113B C114B C115B C116B C117B C118B C119B C120B C154B C155B C156B C157B C175B C176B C177B C178B C183B D11B D12B IC21B IC22B IC23B IC24B IC25B IC35B IC57B R63B R64B R65B R209B R210B
component class U_PIDA_U_Cap_Array_100p_16uA: C80A C81A C82A C83A C84A C85A C86A C87A C88A C89A C96A C97A C98A C99A C100A C101A C102A C103A C104A C105A C106A C107A C108A C109A C110A C111A C112A C113A C114A C115A C116A C117A C118A C119A C120A C154A C155A C156A C157A C175A C176A C177A C178A C183A D11A D12A IC21A IC22A IC23A IC24A IC25A IC35A IC57A R63A R64A R65A R209A R210A
differential pair class Diff_100Ohm: PE_CLK.CLK
net class SHARED_BUS_[0..4]: SHARED_BUS_0 SHARED_BUS_1 SHARED_BUS_2 SHARED_BUS_3 SHARED_BUS_4
net class PWR: NetC172_2 P12V0_DIOT P12V0_EEM
net class HPOW: P12V0_EEM
net class GA[0..3]: GA0 GA1 GA2 GA3
net class ESD_STRIP: STRIP1 STRIP2 STRIP3
net class EEM_IO.LVDS_P[0..15]: EEM_IO.LVDS_P0 EEM_IO.LVDS_P1 EEM_IO.LVDS_P2 EEM_IO.LVDS_P3 EEM_IO.LVDS_P4 EEM_IO.LVDS_P5 EEM_IO.LVDS_P6 EEM_IO.LVDS_P7 EEM_IO.LVDS_P8 EEM_IO.LVDS_P9 EEM_IO.LVDS_P10 EEM_IO.LVDS_P11 EEM_IO.LVDS_P12 EEM_IO.LVDS_P13 EEM_IO.LVDS_P14 EEM_IO.LVDS_P15
net class EEM_IO.LVDS_N[0..15]: EEM_IO.LVDS_N0 EEM_IO.LVDS_N1 EEM_IO.LVDS_N2 EEM_IO.LVDS_N3 EEM_IO.LVDS_N4 EEM_IO.LVDS_N5 EEM_IO.LVDS_N6 EEM_IO.LVDS_N7 EEM_IO.LVDS_N8 EEM_IO.LVDS_N9 EEM_IO.LVDS_N10 EEM_IO.LVDS_N11 EEM_IO.LVDS_N12 EEM_IO.LVDS_N13 EEM_IO.LVDS_N14 EEM_IO.LVDS_N15
net class D100: BP_IO.LVDS_N0 BP_IO.LVDS_N1 BP_IO.LVDS_N2 BP_IO.LVDS_N3 BP_IO.LVDS_N4 BP_IO.LVDS_N5 BP_IO.LVDS_N6 BP_IO.LVDS_N7 BP_IO.LVDS_N8 BP_IO.LVDS_N9 BP_IO.LVDS_N10 BP_IO.LVDS_N11 BP_IO.LVDS_N12 BP_IO.LVDS_N13 BP_IO.LVDS_N14 BP_IO.LVDS_N15 BP_IO.LVDS_P0 BP_IO.LVDS_P1 BP_IO.LVDS_P2 BP_IO.LVDS_P3 BP_IO.LVDS_P4 BP_IO.LVDS_P5 BP_IO.LVDS_P6 BP_IO.LVDS_P7 BP_IO.LVDS_P8 BP_IO.LVDS_P9 BP_IO.LVDS_P10 BP_IO.LVDS_P11 BP_IO.LVDS_P12 BP_IO.LVDS_P13 BP_IO.LVDS_P14 BP_IO.LVDS_P15 EEM_IO.LVDS_N0 EEM_IO.LVDS_N1 EEM_IO.LVDS_N2 EEM_IO.LVDS_N3 EEM_IO.LVDS_N4 EEM_IO.LVDS_N5 EEM_IO.LVDS_N6 EEM_IO.LVDS_N7 EEM_IO.LVDS_N8 EEM_IO.LVDS_N9 EEM_IO.LVDS_N10 EEM_IO.LVDS_N11 EEM_IO.LVDS_N12 EEM_IO.LVDS_N13 EEM_IO.LVDS_N14 EEM_IO.LVDS_N15 EEM_IO.LVDS_P0 EEM_IO.LVDS_P1 EEM_IO.LVDS_P2 EEM_IO.LVDS_P3 EEM_IO.LVDS_P4 EEM_IO.LVDS_P5 EEM_IO.LVDS_P6 EEM_IO.LVDS_P7 EEM_IO.LVDS_P8 EEM_IO.LVDS_P9 EEM_IO.LVDS_P10 EEM_IO.LVDS_P11 EEM_IO.LVDS_P12 EEM_IO.LVDS_P13 EEM_IO.LVDS_P14 EEM_IO.LVDS_P15
net class BP_IO.LVDS_P[0..15]: BP_IO.LVDS_P0 BP_IO.LVDS_P1 BP_IO.LVDS_P2 BP_IO.LVDS_P3 BP_IO.LVDS_P4 BP_IO.LVDS_P5 BP_IO.LVDS_P6 BP_IO.LVDS_P7 BP_IO.LVDS_P8 BP_IO.LVDS_P9 BP_IO.LVDS_P10 BP_IO.LVDS_P11 BP_IO.LVDS_P12 BP_IO.LVDS_P13 BP_IO.LVDS_P14 BP_IO.LVDS_P15
net class BP_IO.LVDS_N[0..15]: BP_IO.LVDS_N0 BP_IO.LVDS_N1 BP_IO.LVDS_N2 BP_IO.LVDS_N3 BP_IO.LVDS_N4 BP_IO.LVDS_N5 BP_IO.LVDS_N6 BP_IO.LVDS_N7 BP_IO.LVDS_N8 BP_IO.LVDS_N9 BP_IO.LVDS_N10 BP_IO.LVDS_N11 BP_IO.LVDS_N12 BP_IO.LVDS_N13 BP_IO.LVDS_N14 BP_IO.LVDS_N15
component class UF_Servo: C2 J1 J3 J4 J5 J10 J11 M1 M2 R1 R2 R3
component class U_Optocouplers: C121 C122 C123 C124 C125 C126 C127 C128 C129 C133 C134 C147 C148 C149 C150 C151 C152 C153 IC26 IC27 IC28 IC29 IC33 IC34 R79 R80 R81 R82 R83 R84 R85 R86 R87 R88 R89 R90 R91 R92 R93 R94 R95 R96 R97 R98 R99 R119 R120 R121 T12 T13 T14 T15 T16 T17
component class U_Isolated_Power_supply: B1 B2 B3 B4 B12 B15 B16 B30 B31 B32 B36 B37 B38 B39 B40 B41 BUSH1 C73 C74 C92 C93 C130 C131 C132 C135 C136 C137 C138 C139 C140 C141 C142 C143 C144 C145 C146 C158 C159 C160 C161 C162 C163 C164 C165 C166 C167 C168 C169 C170 C171 C172 C173 C174 C196 C197 C198 C199 C200 C201 C202 C203 C204 C205 C206 C207 C208 C209 C210 C211 C212 C213 C214 D1 D2 D3 D4 D5 D6 D7 D8 D13 D14 D15 D16 D21 D22 FL1 IC30 IC31 IC32 IC36 IC37 IC38 IC52 IC53 IC54 IC55 J2 L1 L3 L4 L9 L10 LD1 LD2 LD9 LD10 LD11 P1 R100 R101 R102 R103 R104 R105 R106 R107 R108 R109 R110 R111 R112 R113 R114 R115 R117 R118 R126 R127 R128 R129 R132 R134 R135 R137 R139 R140 R141 R142 R191 R192 R193 R194 R195 R196 R197 R198 R199 R200 R201 R202 R203 R204 R205 R206 SW1 T3 T4 T7 T18 T21 T22 Tr1
component class U_Data_Interface: C56 C57 C58 C59 C60 IC9 IC10 IC11 IC12 IC13 R25 R26 R27 R28 R29
component class EEM_Connectors: C219 C220 C298 C306 C307 D27 IC40 IC43 IC44 IC45 IC46 J8 J9 R143 R144 R145 R146 R147 R148 R149 R150 R151 R152 R156 R157 R158 R159 R161 R162 R163 R164 R167 R168 R169 R170 R171 R172 R173 R174 R175 R176 R177 R186 R187 R188 R189 R190 R257 R260 R261 R262
component class CPCIS_Connectors_P1_P6: C1 C179 C180 C181 C182 D23 D24 D25 D26 IC41 IC42 J6 J7 R37 R130 R131 R133 R136 R138 R153 R154 R155 R160 R165 R166 R178 R179 R180 R181 R182 R183 R184 R185 T1 T2 T19 T20
component class U_IO_Expander: C184 C185 C186 C187 C188 C215 IC39 IC47 IC48 IC49 IC50 IC58 R116 R122 R123 R124 R125 R211
channel class Cap_Array_100p_400n: U_PIDA_U_Cap_Array_100p_400nA U_PIDA_U_Cap_Array_100p_400nB U_PIDA_U_Cap_Array_100p_400nC U_PIDA_U_Cap_Array_100p_400nD U_PIDB_U_Cap_Array_100p_400nE U_PIDB_U_Cap_Array_100p_400nF U_PIDB_U_Cap_Array_100p_400nG U_PIDB_U_Cap_Array_100p_400nH
component class U_PIDA_U_Cap_Array_100p_400nD: C39D C40D C41D C42D C43D C44D C45D C46D C47D C48D C49D C50D C51D C52D C53D C54D C55D C61D C62D C63D C64D C65D C66D C67D C68D C69D C70D C71D C72D C75D C76D C77D C78D C79D D9D D10D IC15D IC16D IC17D IC18D IC19D IC56D R60D R61D R62D R207D R208D
component class U_PIDA_U_Cap_Array_100p_400nA: C39A C40A C41A C42A C43A C44A C45A C46A C47A C48A C49A C50A C51A C52A C53A C54A C55A C61A C62A C63A C64A C65A C66A C67A C68A C69A C70A C71A C72A C75A C76A C77A C78A C79A D9A D10A IC15A IC16A IC17A IC18A IC19A IC56A R60A R61A R62A R207A R208A
component class U_PIDA_U_Cap_Array_100p_400nB: C39B C40B C41B C42B C43B C44B C45B C46B C47B C48B C49B C50B C51B C52B C53B C54B C55B C61B C62B C63B C64B C65B C66B C67B C68B C69B C70B C71B C72B C75B C76B C77B C78B C79B D9B D10B IC15B IC16B IC17B IC18B IC19B IC56B R60B R61B R62B R207B R208B
component class U_PIDA_U_Cap_Array_100p_400nC: C39C C40C C41C C42C C43C C44C C45C C46C C47C C48C C49C C50C C51C C52C C53C C54C C55C C61C C62C C63C C64C C65C C66C C67C C68C C69C C70C C71C C72C C75C C76C C77C C78C C79C D9C D10C IC15C IC16C IC17C IC18C IC19C IC56C R60C R61C R62C R207C R208C
component class U_PIDB: C3B C4B C5B C6B C7B C8B C9B C10B C11B C12B C13B C14B C15B C16B C17B C18B C19B C20B C21B C22B C23B C24B C25B C26B C27B C28B C29B C30B C31B C32B C33B C34B C35B C36B C37B C38B C90B C91B C94B C95B C189B C190B D17B IC1B IC2B IC3B IC4B IC5B IC6B IC7B IC8B IC14B IC51B L2B R4B R5B R6B R7B R8B R9B R10B R11B R12B R13B R14B R15B R16B R17B R18B R19B R20B R21B R22B R23B R24B R30B R31B R32B R33B R34B R35B R36B R38B R39B R40B R41B R42B R43B R44B R45B R46B R47B R48B R49B R50B R51B R52B R53B R54B R55B R56B R57B R58B R59B R66B R67B R68B R69B R70B R71B R72B R73B R74B R224B
differential pair BP_MGT_Tx: +BP_MGT_Tx_P -BP_MGT_Tx_N
differential pair BP_MGT_Rx: +BP_MGT_Rx_P -BP_MGT_Rx_N
differential pair PE_CLK.CLK: +PE_CLK.CLK_P -PE_CLK.CLK_N
differential pair EEM_IO.LVDS15: +EEM_IO.LVDS_P15 -EEM_IO.LVDS_N15
differential pair EEM_IO.LVDS14: +EEM_IO.LVDS_P14 -EEM_IO.LVDS_N14
differential pair EEM_IO.LVDS13: +EEM_IO.LVDS_P13 -EEM_IO.LVDS_N13
differential pair EEM_IO.LVDS12: +EEM_IO.LVDS_P12 -EEM_IO.LVDS_N12
differential pair EEM_IO.LVDS11: +EEM_IO.LVDS_P11 -EEM_IO.LVDS_N11
differential pair EEM_IO.LVDS10: +EEM_IO.LVDS_P10 -EEM_IO.LVDS_N10
differential pair EEM_IO.LVDS9: +EEM_IO.LVDS_P9 -EEM_IO.LVDS_N9
differential pair EEM_IO.LVDS8: +EEM_IO.LVDS_P8 -EEM_IO.LVDS_N8
differential pair EEM_IO.LVDS7: +EEM_IO.LVDS_P7 -EEM_IO.LVDS_N7
differential pair EEM_IO.LVDS6: +EEM_IO.LVDS_P6 -EEM_IO.LVDS_N6
differential pair EEM_IO.LVDS5: +EEM_IO.LVDS_P5 -EEM_IO.LVDS_N5
differential pair EEM_IO.LVDS4: +EEM_IO.LVDS_P4 -EEM_IO.LVDS_N4
differential pair EEM_IO.LVDS3: +EEM_IO.LVDS_P3 -EEM_IO.LVDS_N3
differential pair EEM_IO.LVDS2: +EEM_IO.LVDS_P2 -EEM_IO.LVDS_N2
differential pair EEM_IO.LVDS1: +EEM_IO.LVDS_P1 -EEM_IO.LVDS_N1
differential pair EEM_IO.LVDS0: +EEM_IO.LVDS_P0 -EEM_IO.LVDS_N0
differential pair BP_IO.LVDS15: +BP_IO.LVDS_P15 -BP_IO.LVDS_N15
differential pair BP_IO.LVDS14: +BP_IO.LVDS_P14 -BP_IO.LVDS_N14
differential pair BP_IO.LVDS13: +BP_IO.LVDS_P13 -BP_IO.LVDS_N13
differential pair BP_IO.LVDS12: +BP_IO.LVDS_P12 -BP_IO.LVDS_N12
differential pair BP_IO.LVDS11: +BP_IO.LVDS_P11 -BP_IO.LVDS_N11
differential pair BP_IO.LVDS10: +BP_IO.LVDS_P10 -BP_IO.LVDS_N10
differential pair BP_IO.LVDS9: +BP_IO.LVDS_P9 -BP_IO.LVDS_N9
differential pair BP_IO.LVDS8: +BP_IO.LVDS_P8 -BP_IO.LVDS_N8
differential pair BP_IO.LVDS7: +BP_IO.LVDS_P7 -BP_IO.LVDS_N7
differential pair BP_IO.LVDS6: +BP_IO.LVDS_P6 -BP_IO.LVDS_N6
differential pair BP_IO.LVDS5: +BP_IO.LVDS_P5 -BP_IO.LVDS_N5
differential pair BP_IO.LVDS4: +BP_IO.LVDS_P4 -BP_IO.LVDS_N4
differential pair BP_IO.LVDS3: +BP_IO.LVDS_P3 -BP_IO.LVDS_N3
differential pair BP_IO.LVDS2: +BP_IO.LVDS_P2 -BP_IO.LVDS_N2
differential pair BP_IO.LVDS1: +BP_IO.LVDS_P1 -BP_IO.LVDS_N1
differential pair BP_IO.LVDS0: +BP_IO.LVDS_P0 -BP_IO.LVDS_N0

## Components (designator, comment, footprint, x,y, rotation, side; value= is the part's Value field where it differs from the comment)
B1 "SMD Pad" C100 100.362,43.225 r180 top
B2 "SMD Pad" C100 105.5,45.9 r0 top
B3 "SMD Pad" C100 80.2,76.6 r90 top
B4 "SMD Pad" C100 80.4,68.3 r90 top
B12 "SMD Pad" C100 90.7,55 r90 top
B15 "SMD Pad" C100 174.494,84.756 r90 top
B16 "SMD Pad" C100 88.3,86.5 r90 top
B30 "SMD Pad" C100 177.294,67.956 r90 top
B31 "SMD Pad" C100 170.394,10.956 r90 top
B32 "SMD Pad" C100 193.094,89.256 r90 top
B36 "Non Plated Hole" MTG300 101.22,89.799 r37 top
B37 "Non Plated Hole" MTG300 109.645,78.619 r37 top
B38 "Non Plated Hole" MTG300 107.574,49.684 r161 top
B39 "Non Plated Hole" MTG300 112.131,62.921 r161 top
B40 "Non Plated Hole" MTG300 124.049,70.96 r267 top
B41 "Non Plated Hole" MTG300 138.03,70.227 r267 top
BUSH1 "M2.5" WURTH_9774010151 115.062,71.431 r0 top locked
C1 "100nF" CAPC1005X55N 175.794,4.756 r90 top
C2 "22pF" CAPC1005X55N 5.1,-1.5 r0 top
C3A "10pF" CAPC1005X55N 22.6,31.1 r90 top (schematic designator C3)
C3B "10pF" CAPC1005X55N 22.6,75.3 r90 top (schematic designator C3)
C4A "100nF" CAPC1005X55N 28.2,32.1 r270 top (schematic designator C4)
C4B "100nF" CAPC1005X55N 28.2,76.3 r270 top (schematic designator C4)
C5A "10uF" CAPC2012X95N 26,33.5 r0 top (schematic designator C5)
C5B "10uF" CAPC2012X95N 26,77.7 r0 top (schematic designator C5)
C6A "100pF" CAPC1005X55N 44,29 r90 top (schematic designator C6)
C6B "100pF" CAPC1005X55N 44,73.2 r90 top (schematic designator C6)
C7A "33pF" CAPC1005X55N 54.5,29.3 r90 top (schematic designator C7)
C7B "33pF" CAPC1005X55N 54.5,73.5 r90 top (schematic designator C7)
C8A "100nF" CAPC1005X55N 68.9,12.3 r90 top (schematic designator C8)
C8B "100nF" CAPC1005X55N 68.9,56.5 r90 top (schematic designator C8)
C9A "47uF" CAPC3216X180N 69.6,8.9 r270 top (schematic designator C9)
C9B "47uF" CAPC3216X180N 69.6,53.1 r270 top (schematic designator C9)
C10A "39pF" CAPC1005X55N 63.7,23.1 r0 top (schematic designator C10)
C10B "39pF" CAPC1005X55N 63.7,67.3 r0 top (schematic designator C10)
C11A "100nF" CAPC1005X55N 49.6,30.3 r270 top (schematic designator C11)
C11B "100nF" CAPC1005X55N 49.6,74.5 r270 top (schematic designator C11)
C12A "10uF" CAPC2012X95N 47.4,31.7 r0 top (schematic designator C12)
C12B "10uF" CAPC2012X95N 47.4,75.9 r0 top (schematic designator C12)
C13A "100nF" CAPC1005X55N 37.4,31 r270 top (schematic designator C13)
C13B "100nF" CAPC1005X55N 37.4,75.2 r270 top (schematic designator C13)
C14A "10uF" CAPC2012X95N 35.2,32.4 r0 top (schematic designator C14)
C14B "10uF" CAPC2012X95N 35.2,76.6 r0 top (schematic designator C14)
C15A "100nF" CAPC1005X55N 60.1,30.6 r270 top (schematic designator C15)
C15B "100nF" CAPC1005X55N 60.1,74.8 r270 top (schematic designator C15)
C16A "10uF" CAPC2012X95N 57.9,32 r0 top (schematic designator C16)
C16B "10uF" CAPC2012X95N 57.9,76.2 r0 top (schematic designator C16)
C17A "100nF" CAPC1005X55N 65,17.5 r180 top (schematic designator C17)
C17B "100nF" CAPC1005X55N 65,61.7 r180 top (schematic designator C17)
C18A "10uF" CAPC2012X95N 66.4,19.7 r270 top (schematic designator C18)
C18B "10uF" CAPC2012X95N 66.4,63.9 r270 top (schematic designator C18)
C19A "120pF" CAPC1005X55N 66.6,14.4 r0 top (schematic designator C19)
C19B "120pF" CAPC1005X55N 66.6,58.6 r0 top (schematic designator C19)
C20A "120pF" CAPC1005X55N 62.6,4.7 r0 top (schematic designator C20)
C20B "120pF" CAPC1005X55N 62.6,48.9 r0 top (schematic designator C20)
C21A "10uF" CAPC2012X95N 26,27.7 r0 top (schematic designator C21)
C21B "10uF" CAPC2012X95N 26,71.9 r0 top (schematic designator C21)
C22A "100nF" CAPC1005X55N 28.2,29.1 r90 top (schematic designator C22)
C22B "100nF" CAPC1005X55N 28.2,73.3 r90 top (schematic designator C22)
C23A "10pF" CAPC1005X55N 22.6,23.2 r90 top (schematic designator C23)
C23B "10pF" CAPC1005X55N 22.6,67.4 r90 top (schematic designator C23)
C24A "100nF" CAPC1005X55N 28.2,24.2 r270 top (schematic designator C24)
C24B "100nF" CAPC1005X55N 28.2,68.4 r270 top (schematic designator C24)
C25A "10uF" CAPC2012X95N 26,25.6 r0 top (schematic designator C25)
C25B "10uF" CAPC2012X95N 26,69.8 r0 top (schematic designator C25)
C26A "10uF" CAPC2012X95N 47.4,25.9 r0 top (schematic designator C26)
C26B "10uF" CAPC2012X95N 47.4,70.1 r0 top (schematic designator C26)
C27A "100nF" CAPC1005X55N 49.6,27.3 r90 top (schematic designator C27)
C27B "100nF" CAPC1005X55N 49.6,71.5 r90 top (schematic designator C27)
C28A "10uF" CAPC2012X95N 35.2,26.6 r0 top (schematic designator C28)
C28B "10uF" CAPC2012X95N 35.2,70.8 r0 top (schematic designator C28)
C29A "100nF" CAPC1005X55N 37.4,28 r90 top (schematic designator C29)
C29B "100nF" CAPC1005X55N 37.4,72.2 r90 top (schematic designator C29)
C30A "10uF" CAPC2012X95N 57.9,26.2 r0 top (schematic designator C30)
C30B "10uF" CAPC2012X95N 57.9,70.4 r0 top (schematic designator C30)
C31A "100nF" CAPC1005X55N 60.1,27.6 r90 top (schematic designator C31)
C31B "100nF" CAPC1005X55N 60.1,71.8 r90 top (schematic designator C31)
C32A "10uF" CAPC2012X95N 60.6,19.7 r270 top (schematic designator C32)
C32B "10uF" CAPC2012X95N 60.6,63.9 r270 top (schematic designator C32)
C33A "100nF" CAPC1005X55N 62,17.5 r0 top (schematic designator C33)
C33B "100nF" CAPC1005X55N 62,61.7 r0 top (schematic designator C33)
C34A "1uF" CAPC1005X55N 32.3,26.3 r180 top (schematic designator C34)
C34B "1uF" CAPC1005X55N 32.3,70.5 r180 top (schematic designator C34)
C35A "100nF" CAPC1005X55N 58.3,12.3 r90 top (schematic designator C35)
C35B "100nF" CAPC1005X55N 58.3,56.5 r90 top (schematic designator C35)
C36A "47uF" CAPC3216X180N 57.6,8.9 r270 top (schematic designator C36)
C36B "47uF" CAPC3216X180N 57.6,53.1 r270 top (schematic designator C36)
C37A "10uF" CAPC2012X95N 26,19.8 r0 top (schematic designator C37)
C37B "10uF" CAPC2012X95N 26,64 r0 top (schematic designator C37)
C38A "100nF" CAPC1005X55N 28.2,21.2 r90 top (schematic designator C38)
C38B "100nF" CAPC1005X55N 28.2,65.4 r90 top (schematic designator C38)
C39A "100pF" CAPC1005X55N 55.1,12.6 r270 bottom (schematic designator C39)
C39B "100pF" CAPC1005X55N 30.9,17 r90 bottom (schematic designator C39)
C39C "100pF" CAPC1005X55N 43,42.1 r270 bottom (schematic designator C39)
C39D "100pF" CAPC1005X55N 44.1,36.9 r90 bottom (schematic designator C39)
C39E "100pF" CAPC1005X55N 55.1,56.8 r270 bottom (schematic designator C39)
C39F "100pF" CAPC1005X55N 30.9,61.2 r90 bottom (schematic designator C39)
C39G "100pF" CAPC1005X55N 43,86.3 r270 bottom (schematic designator C39)
C39H "100pF" CAPC1005X55N 44.1,81.1 r90 bottom (schematic designator C39)
C40A "200pF" CAPC1005X55N 54.4,7.3 r270 bottom (schematic designator C40)
C40B "200pF" CAPC1005X55N 31.6,22.3 r90 bottom (schematic designator C40)
C40C "200pF" CAPC1005X55N 42.3,36.8 r270 bottom (schematic designator C40)
C40D "200pF" CAPC1005X55N 44.8,42.2 r90 bottom (schematic designator C40)
C40E "200pF" CAPC1005X55N 54.4,51.5 r270 bottom (schematic designator C40)
C40F "200pF" CAPC1005X55N 31.6,66.5 r90 bottom (schematic designator C40)
C40G "200pF" CAPC1005X55N 42.3,81 r270 bottom (schematic designator C40)
C40H "200pF" CAPC1005X55N 44.8,86.4 r90 bottom (schematic designator C40)
C41A "200pF" CAPC1005X55N 51.8,7.3 r270 bottom (schematic designator C41)
C41B "200pF" CAPC1005X55N 34.2,22.3 r90 bottom (schematic designator C41)
C41C "200pF" CAPC1005X55N 39.7,36.8 r270 bottom (schematic designator C41)
C41D "200pF" CAPC1005X55N 47.4,42.2 r90 bottom (schematic designator C41)
C41E "200pF" CAPC1005X55N 51.8,51.5 r270 bottom (schematic designator C41)
C41F "200pF" CAPC1005X55N 34.2,66.5 r90 bottom (schematic designator C41)
C41G "200pF" CAPC1005X55N 39.7,81 r270 bottom (schematic designator C41)
C41H "200pF" CAPC1005X55N 47.4,86.4 r90 bottom (schematic designator C41)
C42A "200pF" CAPC1005X55N 52.8,7.3 r270 bottom (schematic designator C42)
C42B "200pF" CAPC1005X55N 33.2,22.3 r90 bottom (schematic designator C42)
C42C "200pF" CAPC1005X55N 40.7,36.8 r270 bottom (schematic designator C42)
C42D "200pF" CAPC1005X55N 46.4,42.2 r90 bottom (schematic designator C42)
C42E "200pF" CAPC1005X55N 52.8,51.5 r270 bottom (schematic designator C42)
C42F "200pF" CAPC1005X55N 33.2,66.5 r90 bottom (schematic designator C42)
C42G "200pF" CAPC1005X55N 40.7,81 r270 bottom (schematic designator C42)
C42H "200pF" CAPC1005X55N 46.4,86.4 r90 bottom (schematic designator C42)
C43A "750pF" CAPC1005X55N 53,12.6 r90 bottom (schematic designator C43)
C43B "750pF" CAPC1005X55N 33,17 r270 bottom (schematic designator C43)
C43C "750pF" CAPC1005X55N 40.9,42.1 r90 bottom (schematic designator C43)
C43D "750pF" CAPC1005X55N 46.2,36.9 r270 bottom (schematic designator C43)
C43E "750pF" CAPC1005X55N 53,56.8 r90 bottom (schematic designator C43)
C43F "750pF" CAPC1005X55N 33,61.2 r270 bottom (schematic designator C43)
C43G "750pF" CAPC1005X55N 40.9,86.3 r90 bottom (schematic designator C43)
C43H "750pF" CAPC1005X55N 46.2,81.1 r270 bottom (schematic designator C43)
C44A "47pF" CAPC1005X55N 54,12.6 r270 bottom (schematic designator C44)
C44B "47pF" CAPC1005X55N 32,17 r90 bottom (schematic designator C44)
C44C "47pF" CAPC1005X55N 41.9,42.1 r270 bottom (schematic designator C44)
C44D "47pF" CAPC1005X55N 45.2,36.9 r90 bottom (schematic designator C44)
C44E "47pF" CAPC1005X55N 54,56.8 r270 bottom (schematic designator C44)
C44F "47pF" CAPC1005X55N 32,61.2 r90 bottom (schematic designator C44)
C44G "47pF" CAPC1005X55N 41.9,86.3 r270 bottom (schematic designator C44)
C44H "47pF" CAPC1005X55N 45.2,81.1 r90 bottom (schematic designator C44)
C45A "100nF" CAPC1005X55N 52.7,5.5 r0 top (schematic designator C45)
C45B "100nF" CAPC1005X55N 33.3,24.1 r180 top (schematic designator C45)
C45C "100nF" CAPC1005X55N 40.6,35 r0 top (schematic designator C45)
C45D "100nF" CAPC1005X55N 46.5,44 r180 top (schematic designator C45)
C45E "100nF" CAPC1005X55N 52.7,49.7 r0 top (schematic designator C45)
C45F "100nF" CAPC1005X55N 33.3,68.3 r180 top (schematic designator C45)
C45G "100nF" CAPC1005X55N 40.6,79.2 r0 top (schematic designator C45)
C45H "100nF" CAPC1005X55N 46.5,88.2 r180 top (schematic designator C45)
C46A "100nF" CAPC1005X55N 52.7,14.5 r0 top (schematic designator C46)
C46B "100nF" CAPC1005X55N 33.3,15.1 r180 top (schematic designator C46)
C46C "100nF" CAPC1005X55N 40.6,44 r0 top (schematic designator C46)
C46D "100nF" CAPC1005X55N 46.5,35 r180 top (schematic designator C46)
C46E "100nF" CAPC1005X55N 52.7,58.7 r0 top (schematic designator C46)
C46F "100nF" CAPC1005X55N 33.3,59.3 r180 top (schematic designator C46)
C46G "100nF" CAPC1005X55N 40.6,88.2 r0 top (schematic designator C46)
C46H "100nF" CAPC1005X55N 46.5,79.2 r180 top (schematic designator C46)
C47A "1.5nF" CAPC1005X55N 52,12.6 r90 bottom (schematic designator C47)
C47B "1.5nF" CAPC1005X55N 34,17 r270 bottom (schematic designator C47)
C47C "1.5nF" CAPC1005X55N 39.9,42.1 r90 bottom (schematic designator C47)
C47D "1.5nF" CAPC1005X55N 47.2,36.9 r270 bottom (schematic designator C47)
C47E "1.5nF" CAPC1005X55N 52,56.8 r90 bottom (schematic designator C47)
C47F "1.5nF" CAPC1005X55N 34,61.2 r270 bottom (schematic designator C47)
C47G "1.5nF" CAPC1005X55N 39.9,86.3 r90 bottom (schematic designator C47)
C47H "1.5nF" CAPC1005X55N 47.2,81.1 r270 bottom (schematic designator C47)
C48A "100pF" CAPC1005X55N 51,12.6 r270 bottom (schematic designator C48)
C48B "100pF" CAPC1005X55N 35,17 r90 bottom (schematic designator C48)
C48C "100pF" CAPC1005X55N 38.9,42.1 r270 bottom (schematic designator C48)
C48D "100pF" CAPC1005X55N 48.2,36.9 r90 bottom (schematic designator C48)
C48E "100pF" CAPC1005X55N 51,56.8 r270 bottom (schematic designator C48)
C48F "100pF" CAPC1005X55N 35,61.2 r90 bottom (schematic designator C48)
C48G "100pF" CAPC1005X55N 38.9,86.3 r270 bottom (schematic designator C48)
C48H "100pF" CAPC1005X55N 48.2,81.1 r90 bottom (schematic designator C48)
C49A "1.5nF" CAPC1005X55N 48.8,7.3 r270 bottom (schematic designator C49)
C49B "1.5nF" CAPC1005X55N 37.2,22.3 r90 bottom (schematic designator C49)
C49C "1.5nF" CAPC1005X55N 36.7,36.8 r270 bottom (schematic designator C49)
C49D "1.5nF" CAPC1005X55N 50.4,42.2 r90 bottom (schematic designator C49)
C49E "1.5nF" CAPC1005X55N 48.8,51.5 r270 bottom (schematic designator C49)
C49F "1.5nF" CAPC1005X55N 37.2,66.5 r90 bottom (schematic designator C49)
C49G "1.5nF" CAPC1005X55N 36.7,81 r270 bottom (schematic designator C49)
C49H "1.5nF" CAPC1005X55N 50.4,86.4 r90 bottom (schematic designator C49)
C50A "1.5nF" CAPC1005X55N 49.8,7.3 r270 bottom (schematic designator C50)
C50B "1.5nF" CAPC1005X55N 36.2,22.3 r90 bottom (schematic designator C50)
C50C "1.5nF" CAPC1005X55N 37.7,36.8 r270 bottom (schematic designator C50)
C50D "1.5nF" CAPC1005X55N 49.4,42.2 r90 bottom (schematic designator C50)
C50E "1.5nF" CAPC1005X55N 49.8,51.5 r270 bottom (schematic designator C50)
C50F "1.5nF" CAPC1005X55N 36.2,66.5 r90 bottom (schematic designator C50)
C50G "1.5nF" CAPC1005X55N 37.7,81 r270 bottom (schematic designator C50)
C50H "1.5nF" CAPC1005X55N 49.4,86.4 r90 bottom (schematic designator C50)
C51A "200pF" CAPC1005X55N 50.8,7.3 r270 bottom (schematic designator C51)
C51B "200pF" CAPC1005X55N 35.2,22.3 r90 bottom (schematic designator C51)
C51C "200pF" CAPC1005X55N 38.7,36.8 r270 bottom (schematic designator C51)
C51D "200pF" CAPC1005X55N 48.4,42.2 r90 bottom (schematic designator C51)
C51E "200pF" CAPC1005X55N 50.8,51.5 r270 bottom (schematic designator C51)
C51F "200pF" CAPC1005X55N 35.2,66.5 r90 bottom (schematic designator C51)
C51G "200pF" CAPC1005X55N 38.7,81 r270 bottom (schematic designator C51)
C51H "200pF" CAPC1005X55N 48.4,86.4 r90 bottom (schematic designator C51)
C52A "4.7nF" CAPC1608X90N 45.8,7.4 r270 bottom (schematic designator C52)
C52B "4.7nF" CAPC1608X90N 40.2,22.2 r90 bottom (schematic designator C52)
C52C "4.7nF" CAPC1608X90N 33.7,36.9 r270 bottom (schematic designator C52)
C52D "4.7nF" CAPC1608X90N 53.4,42.1 r90 bottom (schematic designator C52)
C52E "4.7nF" CAPC1608X90N 45.8,51.6 r270 bottom (schematic designator C52)
C52F "4.7nF" CAPC1608X90N 40.2,66.4 r90 bottom (schematic designator C52)
C52G "4.7nF" CAPC1608X90N 33.7,81.1 r270 bottom (schematic designator C52)
C52H "4.7nF" CAPC1608X90N 53.4,86.3 r90 bottom (schematic designator C52)
C53A "1.5nF" CAPC1005X55N 47.9,7.3 r270 bottom (schematic designator C53)
C53B "1.5nF" CAPC1005X55N 38.1,22.3 r90 bottom (schematic designator C53)
C53C "1.5nF" CAPC1005X55N 35.8,36.8 r270 bottom (schematic designator C53)
C53D "1.5nF" CAPC1005X55N 51.3,42.2 r90 bottom (schematic designator C53)
C53E "1.5nF" CAPC1005X55N 47.9,51.5 r270 bottom (schematic designator C53)
C53F "1.5nF" CAPC1005X55N 38.1,66.5 r90 bottom (schematic designator C53)
C53G "1.5nF" CAPC1005X55N 35.8,81 r270 bottom (schematic designator C53)
C53H "1.5nF" CAPC1005X55N 51.3,86.4 r90 bottom (schematic designator C53)
C54A "100pF" CAPC1005X55N 47,7.3 r90 bottom (schematic designator C54)
C54B "100pF" CAPC1005X55N 39,22.3 r270 bottom (schematic designator C54)
C54C "100pF" CAPC1005X55N 34.9,36.8 r90 bottom (schematic designator C54)
C54D "100pF" CAPC1005X55N 52.2,42.2 r270 bottom (schematic designator C54)
C54E "100pF" CAPC1005X55N 47,51.5 r90 bottom (schematic designator C54)
C54F "100pF" CAPC1005X55N 39,66.5 r270 bottom (schematic designator C54)
C54G "100pF" CAPC1005X55N 34.9,81 r90 bottom (schematic designator C54)
C54H "100pF" CAPC1005X55N 52.2,86.4 r270 bottom (schematic designator C54)
C55A "10nF" CAPC1608X90N 47.3,12.2 r90 bottom (schematic designator C55)
C55B "10nF" CAPC1608X90N 38.7,17.4 r270 bottom (schematic designator C55)
C55C "10nF" CAPC1608X90N 35.2,41.7 r90 bottom (schematic designator C55)
C55D "10nF" CAPC1608X90N 51.9,37.3 r270 bottom (schematic designator C55)
C55E "10nF" CAPC1608X90N 47.3,56.4 r90 bottom (schematic designator C55)
C55F "10nF" CAPC1608X90N 38.7,61.6 r270 bottom (schematic designator C55)
C55G "10nF" CAPC1608X90N 35.2,85.9 r90 bottom (schematic designator C55)
C55H "10nF" CAPC1608X90N 51.9,81.5 r270 bottom (schematic designator C55)
C56 "100nF" CAPC1005X55N 152.394,62.456 r270 top
C57 "100nF" CAPC1005X55N 152.394,56.756 r270 top
C58 "100nF" CAPC1005X55N 118.2,44.35 r180 top
C59 "100nF" CAPC1005X55N 161.394,43.356 r180 top
C60 "100nF" CAPC1005X55N 158.694,48.956 r180 top
C61A "2.7nF" CAPC1608X90N 48.8,12.2 r90 bottom (schematic designator C61)
C61B "2.7nF" CAPC1608X90N 37.2,17.4 r270 bottom (schematic designator C61)
C61C "2.7nF" CAPC1608X90N 36.7,41.7 r90 bottom (schematic designator C61)
C61D "2.7nF" CAPC1608X90N 50.4,37.3 r270 bottom (schematic designator C61)
C61E "2.7nF" CAPC1608X90N 48.8,56.4 r90 bottom (schematic designator C61)
C61F "2.7nF" CAPC1608X90N 37.2,61.6 r270 bottom (schematic designator C61)
C61G "2.7nF" CAPC1608X90N 36.7,85.9 r90 bottom (schematic designator C61)
C61H "2.7nF" CAPC1608X90N 50.4,81.5 r270 bottom (schematic designator C61)
C62A "100nF" CAPC1005X55N 47.1,5.5 r0 top (schematic designator C62)
C62B "100nF" CAPC1005X55N 38.9,24.1 r180 top (schematic designator C62)
C62C "100nF" CAPC1005X55N 35,35 r0 top (schematic designator C62)
C62D "100nF" CAPC1005X55N 52.1,44 r180 top (schematic designator C62)
C62E "100nF" CAPC1005X55N 47.1,49.7 r0 top (schematic designator C62)
C62F "100nF" CAPC1005X55N 38.9,68.3 r180 top (schematic designator C62)
C62G "100nF" CAPC1005X55N 35,79.2 r0 top (schematic designator C62)
C62H "100nF" CAPC1005X55N 52.1,88.2 r180 top (schematic designator C62)
C63A "100nF" CAPC1005X55N 47.1,14.5 r0 top (schematic designator C63)
C63B "100nF" CAPC1005X55N 38.9,15.1 r180 top (schematic designator C63)
C63C "100nF" CAPC1005X55N 35,44 r0 top (schematic designator C63)
C63D "100nF" CAPC1005X55N 52.1,35 r180 top (schematic designator C63)
C63E "100nF" CAPC1005X55N 47.1,58.7 r0 top (schematic designator C63)
C63F "100nF" CAPC1005X55N 38.9,59.3 r180 top (schematic designator C63)
C63G "100nF" CAPC1005X55N 35,88.2 r0 top (schematic designator C63)
C63H "100nF" CAPC1005X55N 52.1,79.2 r180 top (schematic designator C63)
C64A "100pF" CAPC1005X55N 50,12.6 r270 bottom (schematic designator C64)
C64B "100pF" CAPC1005X55N 36,17 r90 bottom (schematic designator C64)
C64C "100pF" CAPC1005X55N 37.9,42.1 r270 bottom (schematic designator C64)
C64D "100pF" CAPC1005X55N 49.2,36.9 r90 bottom (schematic designator C64)
C64E "100pF" CAPC1005X55N 50,56.8 r270 bottom (schematic designator C64)
C64F "100pF" CAPC1005X55N 36,61.2 r90 bottom (schematic designator C64)
C64G "100pF" CAPC1005X55N 37.9,86.3 r270 bottom (schematic designator C64)
C64H "100pF" CAPC1005X55N 49.2,81.1 r90 bottom (schematic designator C64)
C65A "22nF" CAPC2012X95N 44,12 r90 bottom (schematic designator C65)
C65B "22nF" CAPC2012X95N 42,17.6 r270 bottom (schematic designator C65)
C65C "22nF" CAPC2012X95N 31.9,41.5 r90 bottom (schematic designator C65)
C65D "22nF" CAPC2012X95N 55.2,37.5 r270 bottom (schematic designator C65)
C65E "22nF" CAPC2012X95N 44,56.2 r90 bottom (schematic designator C65)
C65F "22nF" CAPC2012X95N 42,61.8 r270 bottom (schematic designator C65)
C65G "22nF" CAPC2012X95N 31.9,85.7 r90 bottom (schematic designator C65)
C65H "22nF" CAPC2012X95N 55.2,81.7 r270 bottom (schematic designator C65)
C66A "3.3nF" CAPC1608X90N 45.8,12.2 r90 bottom (schematic designator C66)
C66B "3.3nF" CAPC1608X90N 40.2,17.4 r270 bottom (schematic designator C66)
C66C "3.3nF" CAPC1608X90N 33.7,41.7 r90 bottom (schematic designator C66)
C66D "3.3nF" CAPC1608X90N 53.4,37.3 r270 bottom (schematic designator C66)
C66E "3.3nF" CAPC1608X90N 45.8,56.4 r90 bottom (schematic designator C66)
C66F "3.3nF" CAPC1608X90N 40.2,61.6 r270 bottom (schematic designator C66)
C66G "3.3nF" CAPC1608X90N 33.7,85.9 r90 bottom (schematic designator C66)
C66H "3.3nF" CAPC1608X90N 53.4,81.5 r270 bottom (schematic designator C66)
C67A "100pF" CAPC1005X55N 42.5,11.9 r270 bottom (schematic designator C67)
C67B "100pF" CAPC1005X55N 43.5,17.7 r90 bottom (schematic designator C67)
C67C "100pF" CAPC1005X55N 30.4,41.4 r270 bottom (schematic designator C67)
C67D "100pF" CAPC1005X55N 56.7,37.6 r90 bottom (schematic designator C67)
C67E "100pF" CAPC1005X55N 42.5,56.1 r270 bottom (schematic designator C67)
C67F "100pF" CAPC1005X55N 43.5,61.9 r90 bottom (schematic designator C67)
C67G "100pF" CAPC1005X55N 30.4,85.6 r270 bottom (schematic designator C67)
C67H "100pF" CAPC1005X55N 56.7,81.8 r90 bottom (schematic designator C67)
C68A "39nF" CAPC2012X95N 42.5,7.6 r270 bottom (schematic designator C68)
C68B "39nF" CAPC2012X95N 43.5,22 r90 bottom (schematic designator C68)
C68C "39nF" CAPC2012X95N 30.4,37.1 r270 bottom (schematic designator C68)
C68D "39nF" CAPC2012X95N 56.7,41.9 r90 bottom (schematic designator C68)
C68E "39nF" CAPC2012X95N 42.5,51.8 r270 bottom (schematic designator C68)
C68F "39nF" CAPC2012X95N 43.5,66.2 r90 bottom (schematic designator C68)
C68G "39nF" CAPC2012X95N 30.4,81.3 r270 bottom (schematic designator C68)
C68H "39nF" CAPC2012X95N 56.7,86.1 r90 bottom (schematic designator C68)
C69A "12nF" CAPC1608X90N 44.3,7.4 r270 bottom (schematic designator C69)
C69B "12nF" CAPC1608X90N 41.7,22.2 r90 bottom (schematic designator C69)
C69C "12nF" CAPC1608X90N 32.2,36.9 r270 bottom (schematic designator C69)
C69D "12nF" CAPC1608X90N 54.9,42.1 r90 bottom (schematic designator C69)
C69E "12nF" CAPC1608X90N 44.3,51.6 r270 bottom (schematic designator C69)
C69F "12nF" CAPC1608X90N 41.7,66.4 r90 bottom (schematic designator C69)
C69G "12nF" CAPC1608X90N 32.2,81.1 r270 bottom (schematic designator C69)
C69H "12nF" CAPC1608X90N 54.9,86.3 r90 bottom (schematic designator C69)
C70A "200pF" CAPC1005X55N 41,7.6 r270 bottom (schematic designator C70)
C70B "200pF" CAPC1005X55N 45,22 r90 bottom (schematic designator C70)
C70C "200pF" CAPC1005X55N 28.9,37.1 r270 bottom (schematic designator C70)
C70D "200pF" CAPC1005X55N 58.2,41.9 r90 bottom (schematic designator C70)
C70E "200pF" CAPC1005X55N 41,51.8 r270 bottom (schematic designator C70)
C70F "200pF" CAPC1005X55N 45,66.2 r90 bottom (schematic designator C70)
C70G "200pF" CAPC1005X55N 28.9,81.3 r270 bottom (schematic designator C70)
C70H "200pF" CAPC1005X55N 58.2,86.1 r90 bottom (schematic designator C70)
C71A "100nF" CAPC1810X06N 39.65,7.75 r270 bottom (schematic designator C71)
C71B "100nF" CAPC1810X06N 46.35,21.85 r90 bottom (schematic designator C71)
C71C "100nF" CAPC1810X06N 27.55,37.25 r270 bottom (schematic designator C71)
C71D "100nF" CAPC1810X06N 59.55,41.75 r90 bottom (schematic designator C71)
C71E "100nF" CAPC1810X06N 39.65,51.95 r270 bottom (schematic designator C71)
C71F "100nF" CAPC1810X06N 46.35,66.05 r90 bottom (schematic designator C71)
C71G "100nF" CAPC1810X06N 27.55,81.45 r270 bottom (schematic designator C71)
C71H "100nF" CAPC1810X06N 59.55,85.95 r90 bottom (schematic designator C71)
C72A "100nF" CAPC1810X06N 39.5,12.1 r90 bottom (schematic designator C72)
C72B "100nF" CAPC1810X06N 46.5,17.5 r270 bottom (schematic designator C72)
C72C "100nF" CAPC1810X06N 27.4,41.6 r90 bottom (schematic designator C72)
C72D "100nF" CAPC1810X06N 59.7,37.4 r270 bottom (schematic designator C72)
C72E "100nF" CAPC1810X06N 39.5,56.3 r90 bottom (schematic designator C72)
C72F "100nF" CAPC1810X06N 46.5,61.7 r270 bottom (schematic designator C72)
C72G "100nF" CAPC1810X06N 27.4,85.8 r90 bottom (schematic designator C72)
C72H "100nF" CAPC1810X06N 59.7,81.6 r270 bottom (schematic designator C72)
C73 "47uF" CAPC3216X180N 89.2,57.1 r180 top
C74 "47uF" CAPC3216X180N 89.2,59.5 r180 top
C75A "100nF" CAPC1810X06N 41.2,12.1 r90 bottom (schematic designator C75)
C75B "100nF" CAPC1810X06N 44.8,17.5 r270 bottom (schematic designator C75)
C75C "100nF" CAPC1810X06N 29.1,41.6 r90 bottom (schematic designator C75)
C75D "100nF" CAPC1810X06N 58,37.4 r270 bottom (schematic designator C75)
C75E "100nF" CAPC1810X06N 41.2,56.3 r90 bottom (schematic designator C75)
C75F "100nF" CAPC1810X06N 44.8,61.7 r270 bottom (schematic designator C75)
C75G "100nF" CAPC1810X06N 29.1,85.8 r90 bottom (schematic designator C75)
C75H "100nF" CAPC1810X06N 58,81.6 r270 bottom (schematic designator C75)
C76A "100nF" CAPC1005X55N 41.5,5.5 r0 top (schematic designator C76)
C76B "100nF" CAPC1005X55N 44.5,24.1 r180 top (schematic designator C76)
C76C "100nF" CAPC1005X55N 29.4,35 r0 top (schematic designator C76)
C76D "100nF" CAPC1005X55N 57.7,44 r180 top (schematic designator C76)
C76E "100nF" CAPC1005X55N 41.5,49.7 r0 top (schematic designator C76)
C76F "100nF" CAPC1005X55N 44.5,68.3 r180 top (schematic designator C76)
C76G "100nF" CAPC1005X55N 29.4,79.2 r0 top (schematic designator C76)
C76H "100nF" CAPC1005X55N 57.7,88.2 r180 top (schematic designator C76)
C77A "100nF" CAPC1005X55N 41.5,14.5 r0 top (schematic designator C77)
C77B "100nF" CAPC1005X55N 44.5,15.1 r180 top (schematic designator C77)
C77C "100nF" CAPC1005X55N 29.4,44 r0 top (schematic designator C77)
C77D "100nF" CAPC1005X55N 57.7,35 r180 top (schematic designator C77)
C77E "100nF" CAPC1005X55N 41.5,58.7 r0 top (schematic designator C77)
C77F "100nF" CAPC1005X55N 44.5,59.3 r180 top (schematic designator C77)
C77G "100nF" CAPC1005X55N 29.4,88.2 r0 top (schematic designator C77)
C77H "100nF" CAPC1005X55N 57.7,79.2 r180 top (schematic designator C77)
C78A "390nF" CAPC1608X90N 37.2,6.9 r180 top (schematic designator C78)
C78B "390nF" CAPC1608X90N 48.8,22.7 r0 top (schematic designator C78)
C78C "390nF" CAPC1608X90N 25.1,36.4 r180 top (schematic designator C78)
C78D "390nF" CAPC1608X90N 62,42.6 r0 top (schematic designator C78)
C78E "390nF" CAPC1608X90N 37.2,51.1 r180 top (schematic designator C78)
C78F "390nF" CAPC1608X90N 48.8,66.9 r0 top (schematic designator C78)
C78G "390nF" CAPC1608X90N 25.1,80.6 r180 top (schematic designator C78)
C78H "390nF" CAPC1608X90N 62,86.8 r0 top (schematic designator C78)
C79A "10nF" CAPC1608X90N 37.2,8.5 r180 top (schematic designator C79)
C79B "10nF" CAPC1608X90N 48.8,21.1 r0 top (schematic designator C79)
C79C "10nF" CAPC1608X90N 25.1,38 r180 top (schematic designator C79)
C79D "10nF" CAPC1608X90N 62,41 r0 top (schematic designator C79)
C79E "10nF" CAPC1608X90N 37.2,52.7 r180 top (schematic designator C79)
C79F "10nF" CAPC1608X90N 48.8,65.3 r0 top (schematic designator C79)
C79G "10nF" CAPC1608X90N 25.1,82.2 r180 top (schematic designator C79)
C79H "10nF" CAPC1608X90N 62,85.2 r0 top (schematic designator C79)
C80A "390nF" CAPC1608X90N 75.3,31.7 r0 bottom (schematic designator C80)
C80B "390nF" CAPC1608X90N 75.3,75.9 r0 bottom (schematic designator C80)
C81A "10nF" CAPC1005X55N 75.2,32.9 r180 bottom (schematic designator C81)
C81B "10nF" CAPC1005X55N 75.2,77.1 r180 bottom (schematic designator C81)
C82A "680nF" CAPC1608X90N 70.5,31.6 r180 bottom (schematic designator C82)
C82B "680nF" CAPC1608X90N 70.5,75.8 r180 bottom (schematic designator C82)
C83A "100nF" CAPC1005X55N 70.7,32.8 r180 bottom (schematic designator C83)
C83B "100nF" CAPC1005X55N 70.7,77 r180 bottom (schematic designator C83)
C84A "22nF" CAPC1005X55N 70.7,33.7 r0 bottom (schematic designator C84)